# Altium PCB PMS.PcbDoc (part 1 of 2)
Units mil, origin at the board's own origin, x right, y up, seen from the top; angles counter-clockwise.
Board outline 4750 x 3250 mil, 4 copper layers (Top Layer, Layer 1, Layer 2, Bottom Layer), stack 23.756 mil thick; 171 components, 112 nets, 581 pads, 159 vias.
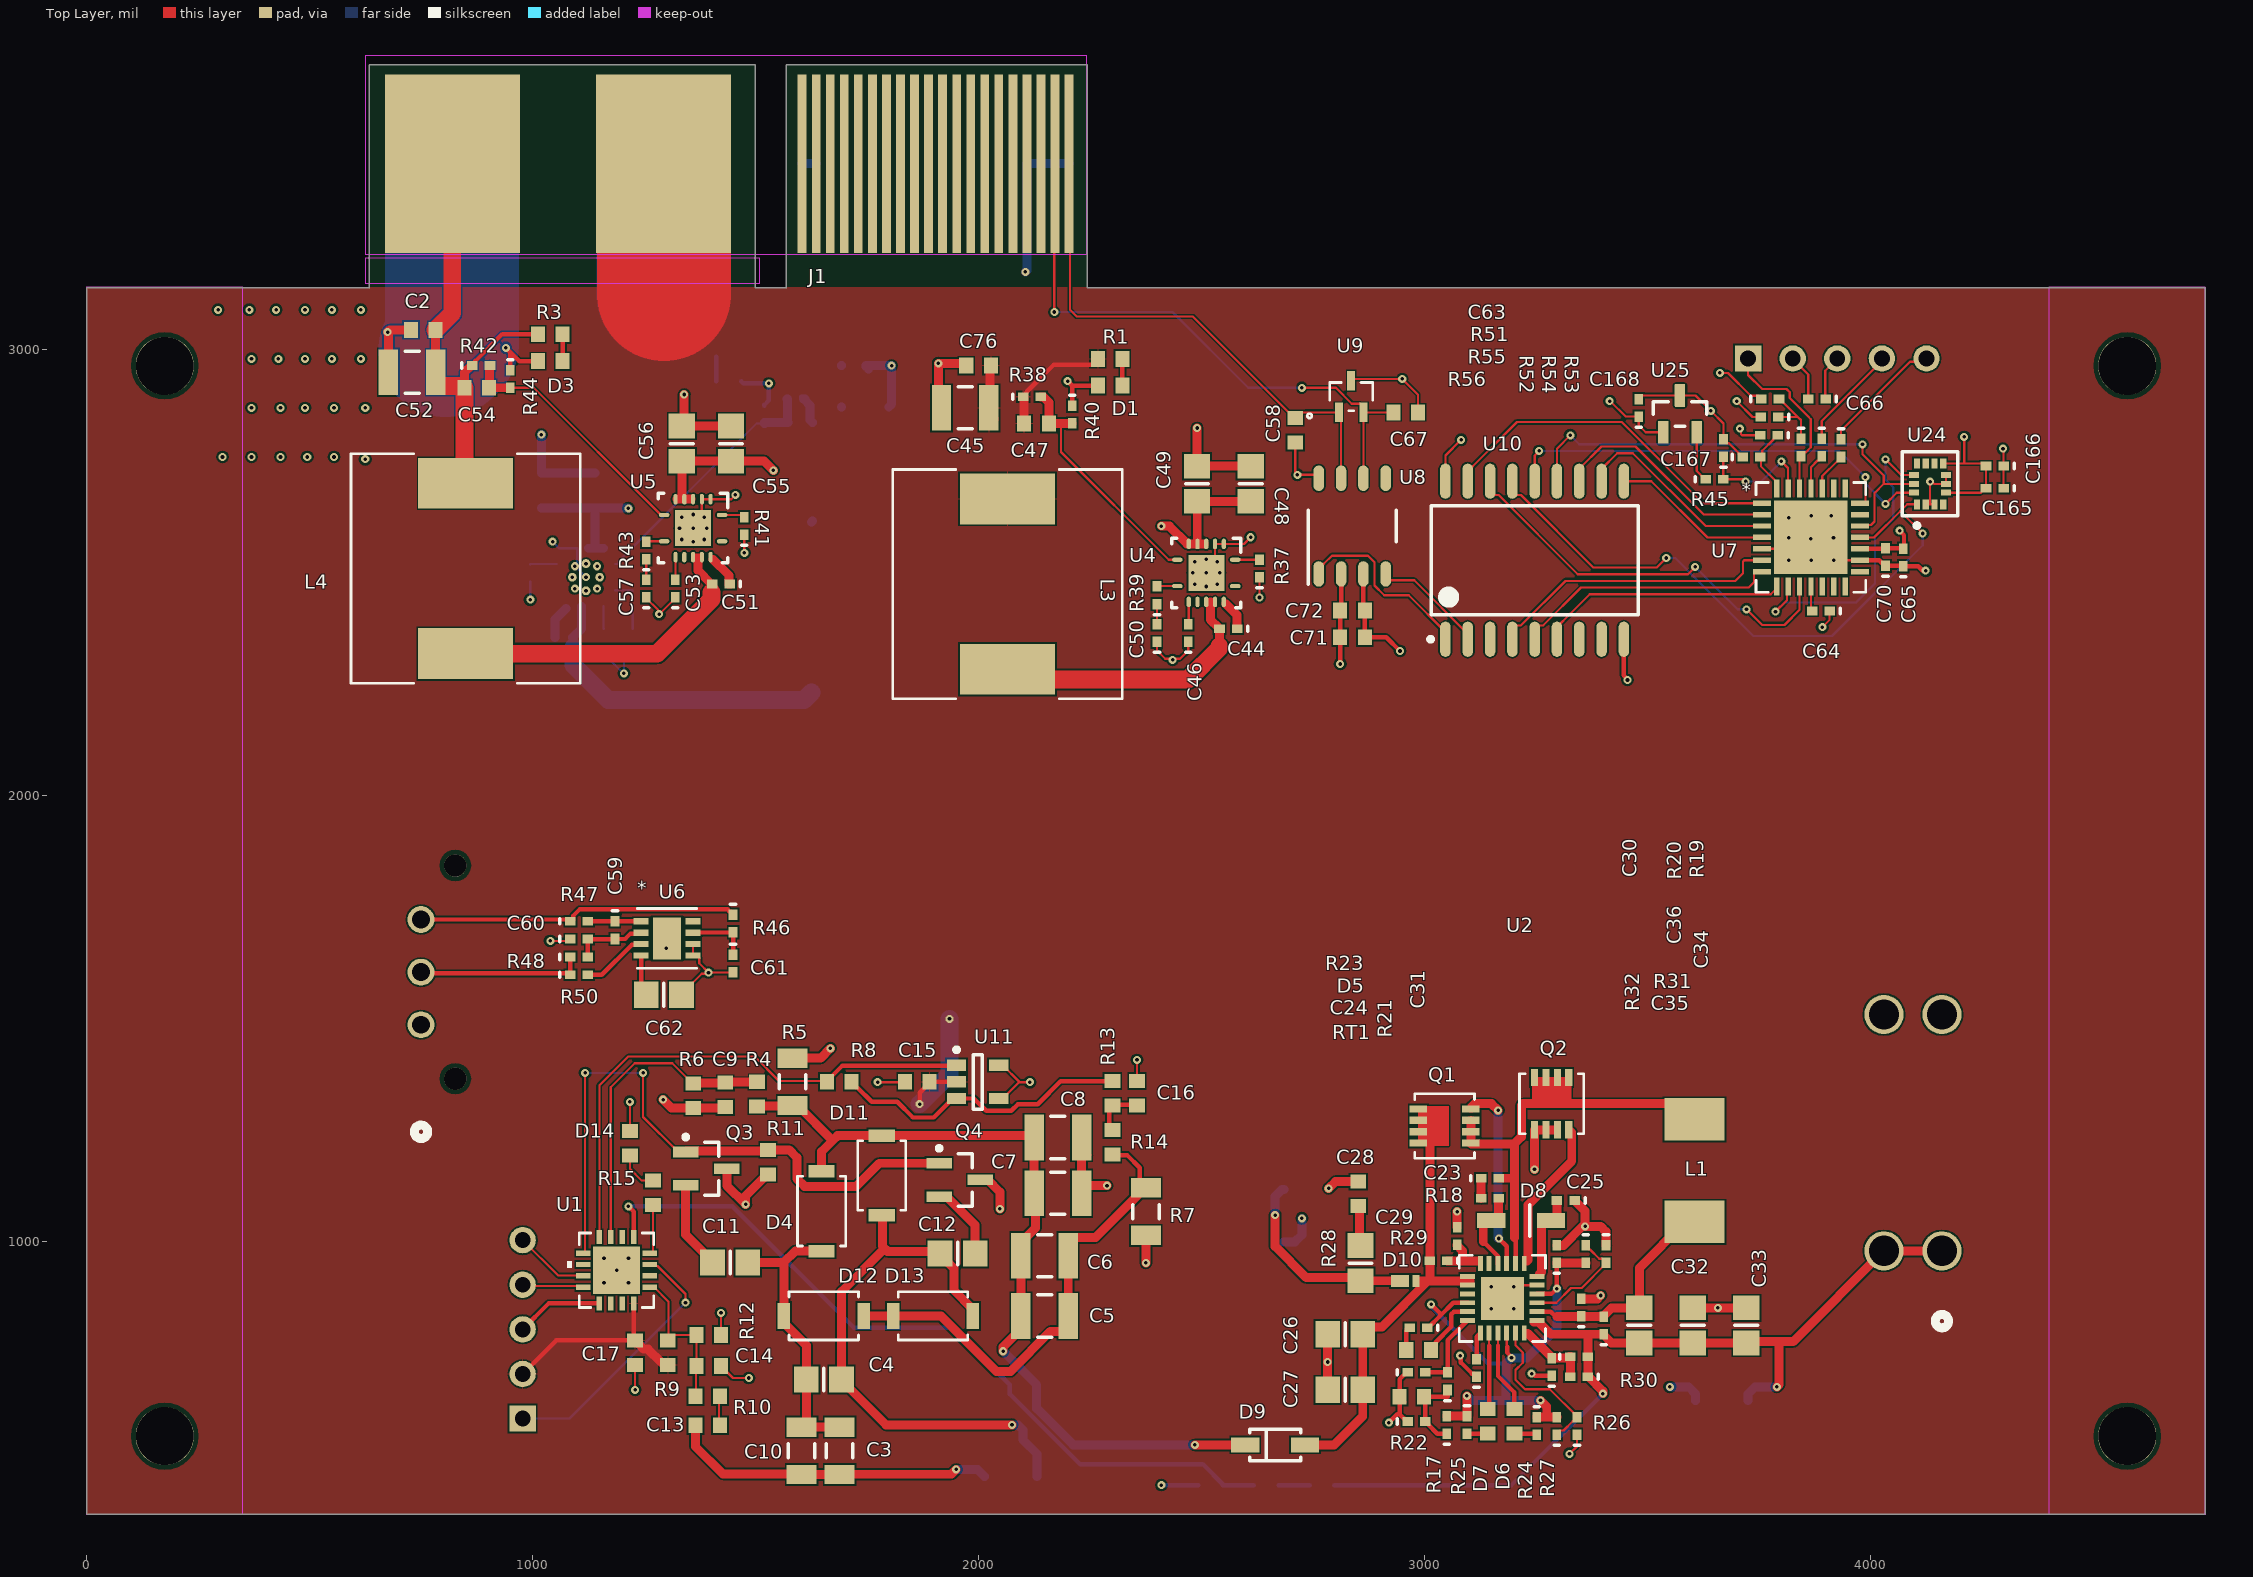
[diagram p0: Top Layer view]
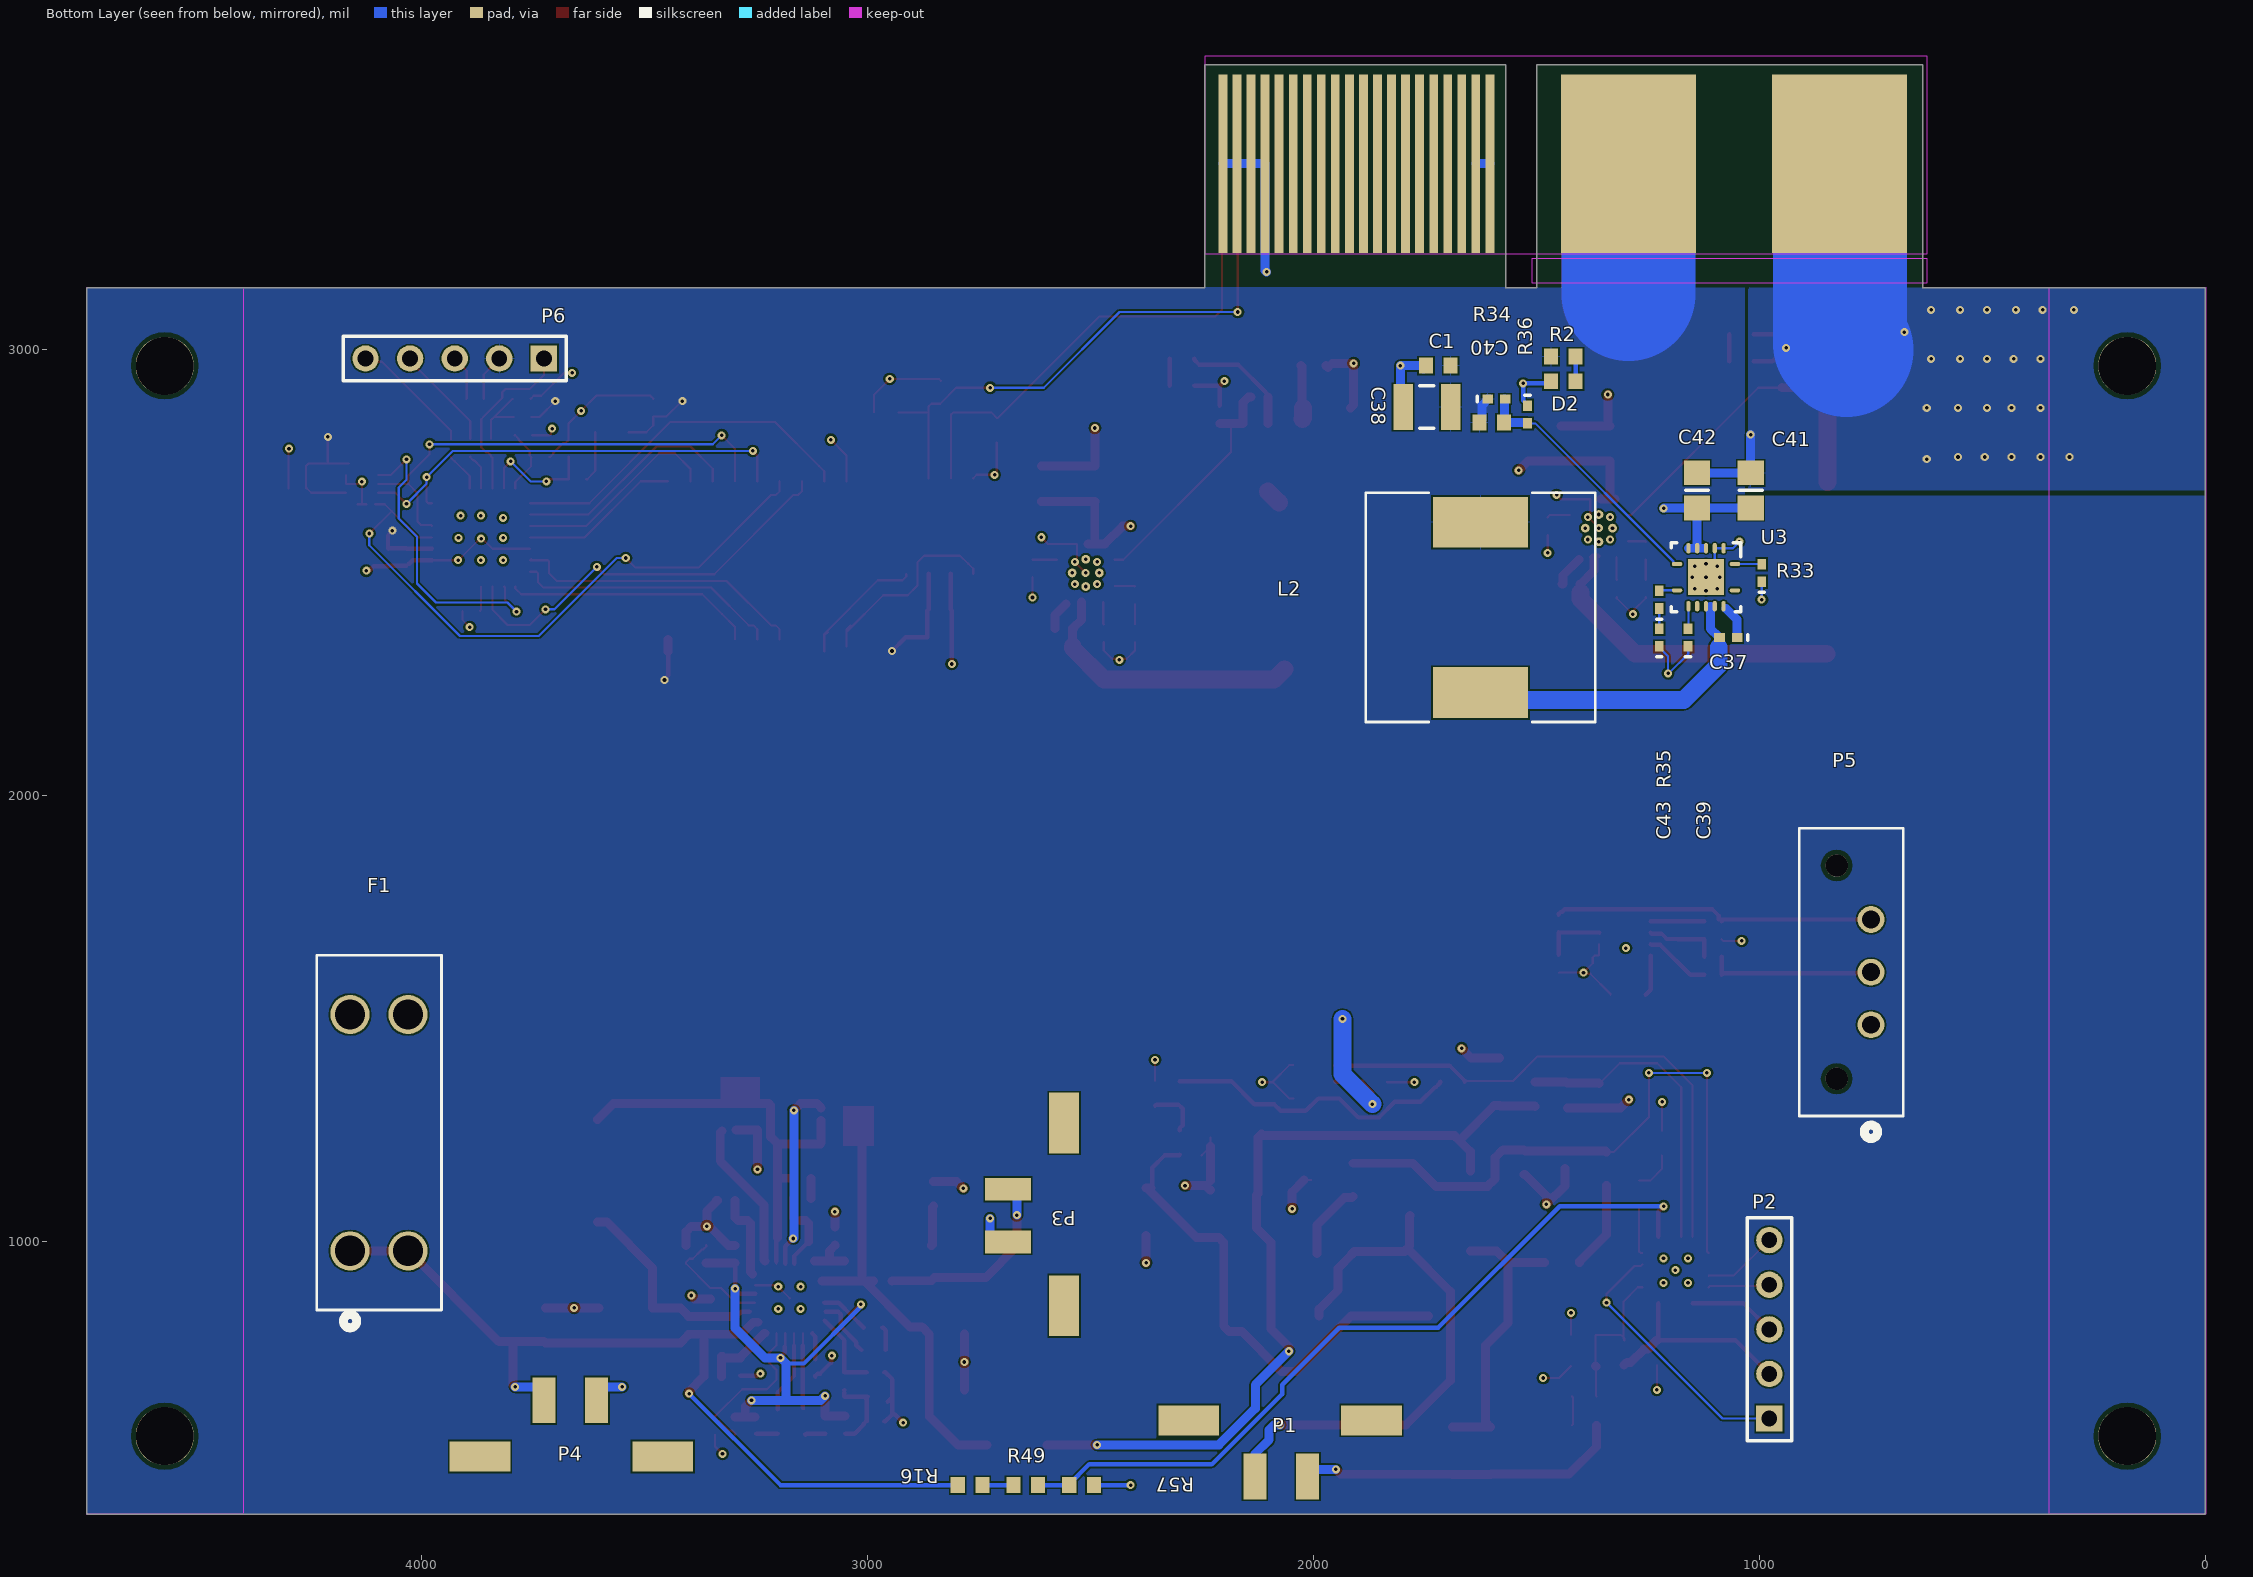
[diagram p1: Bottom Layer view, seen from below]
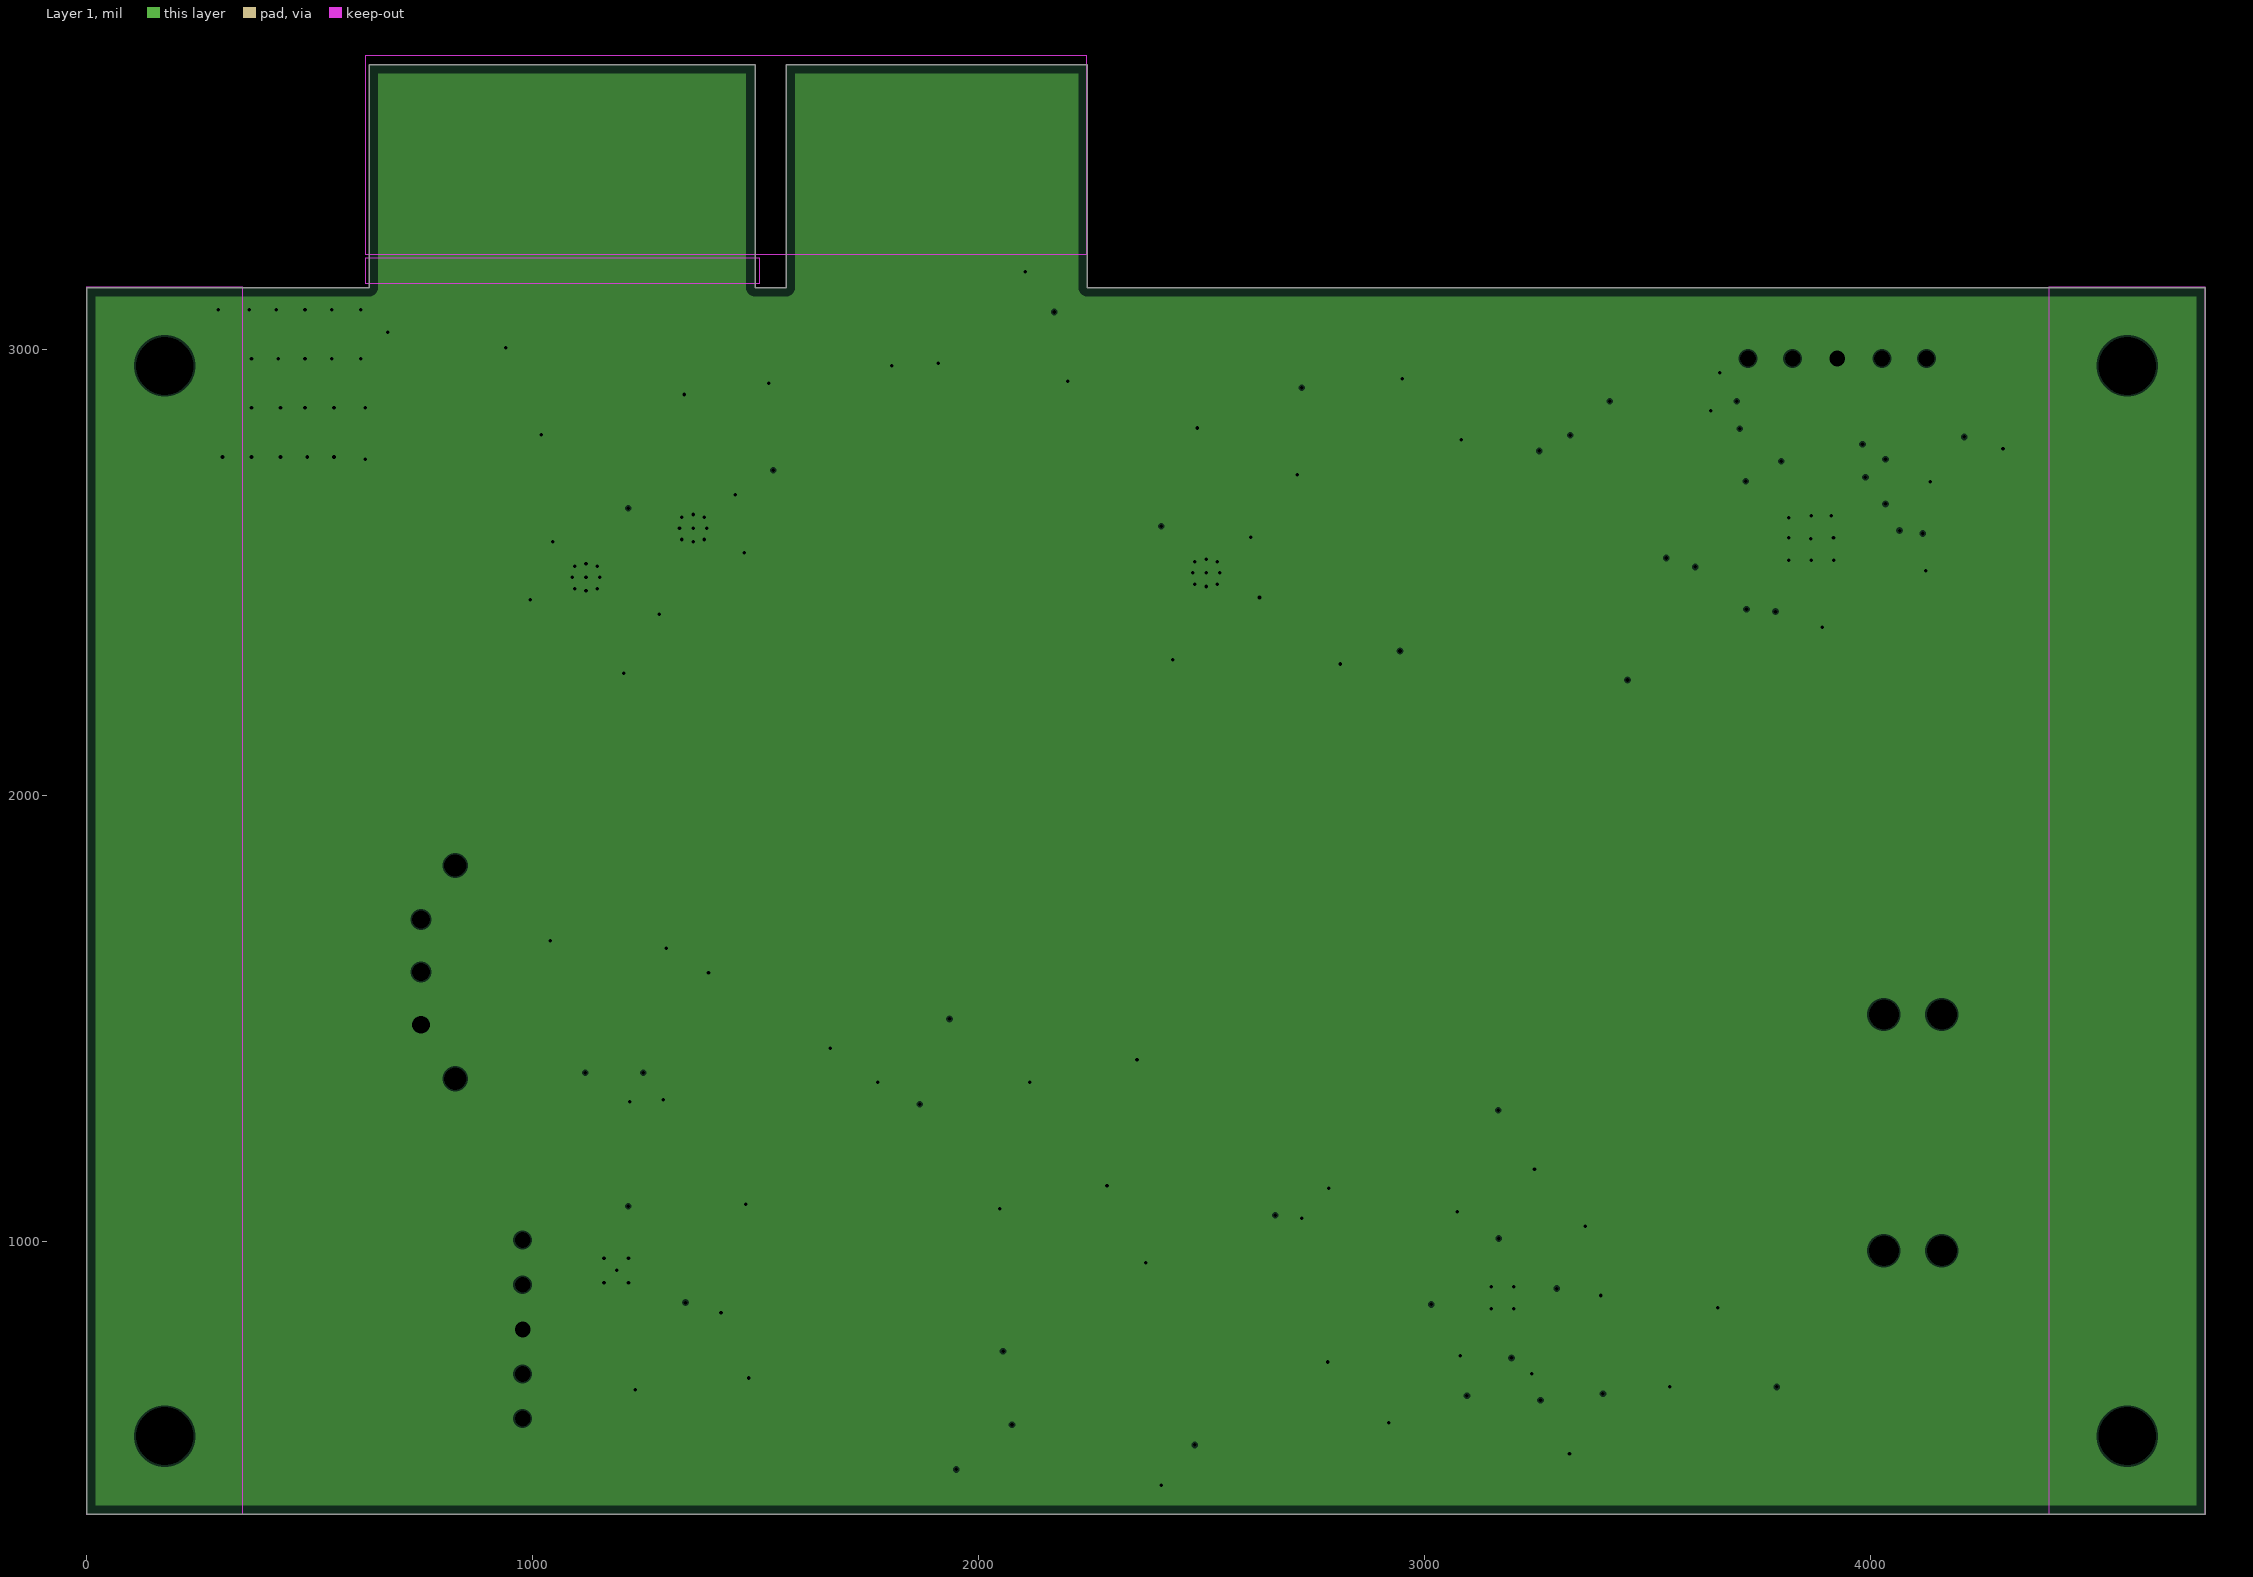
[diagram p2: Layer 1, clearances drawn from the general rule]
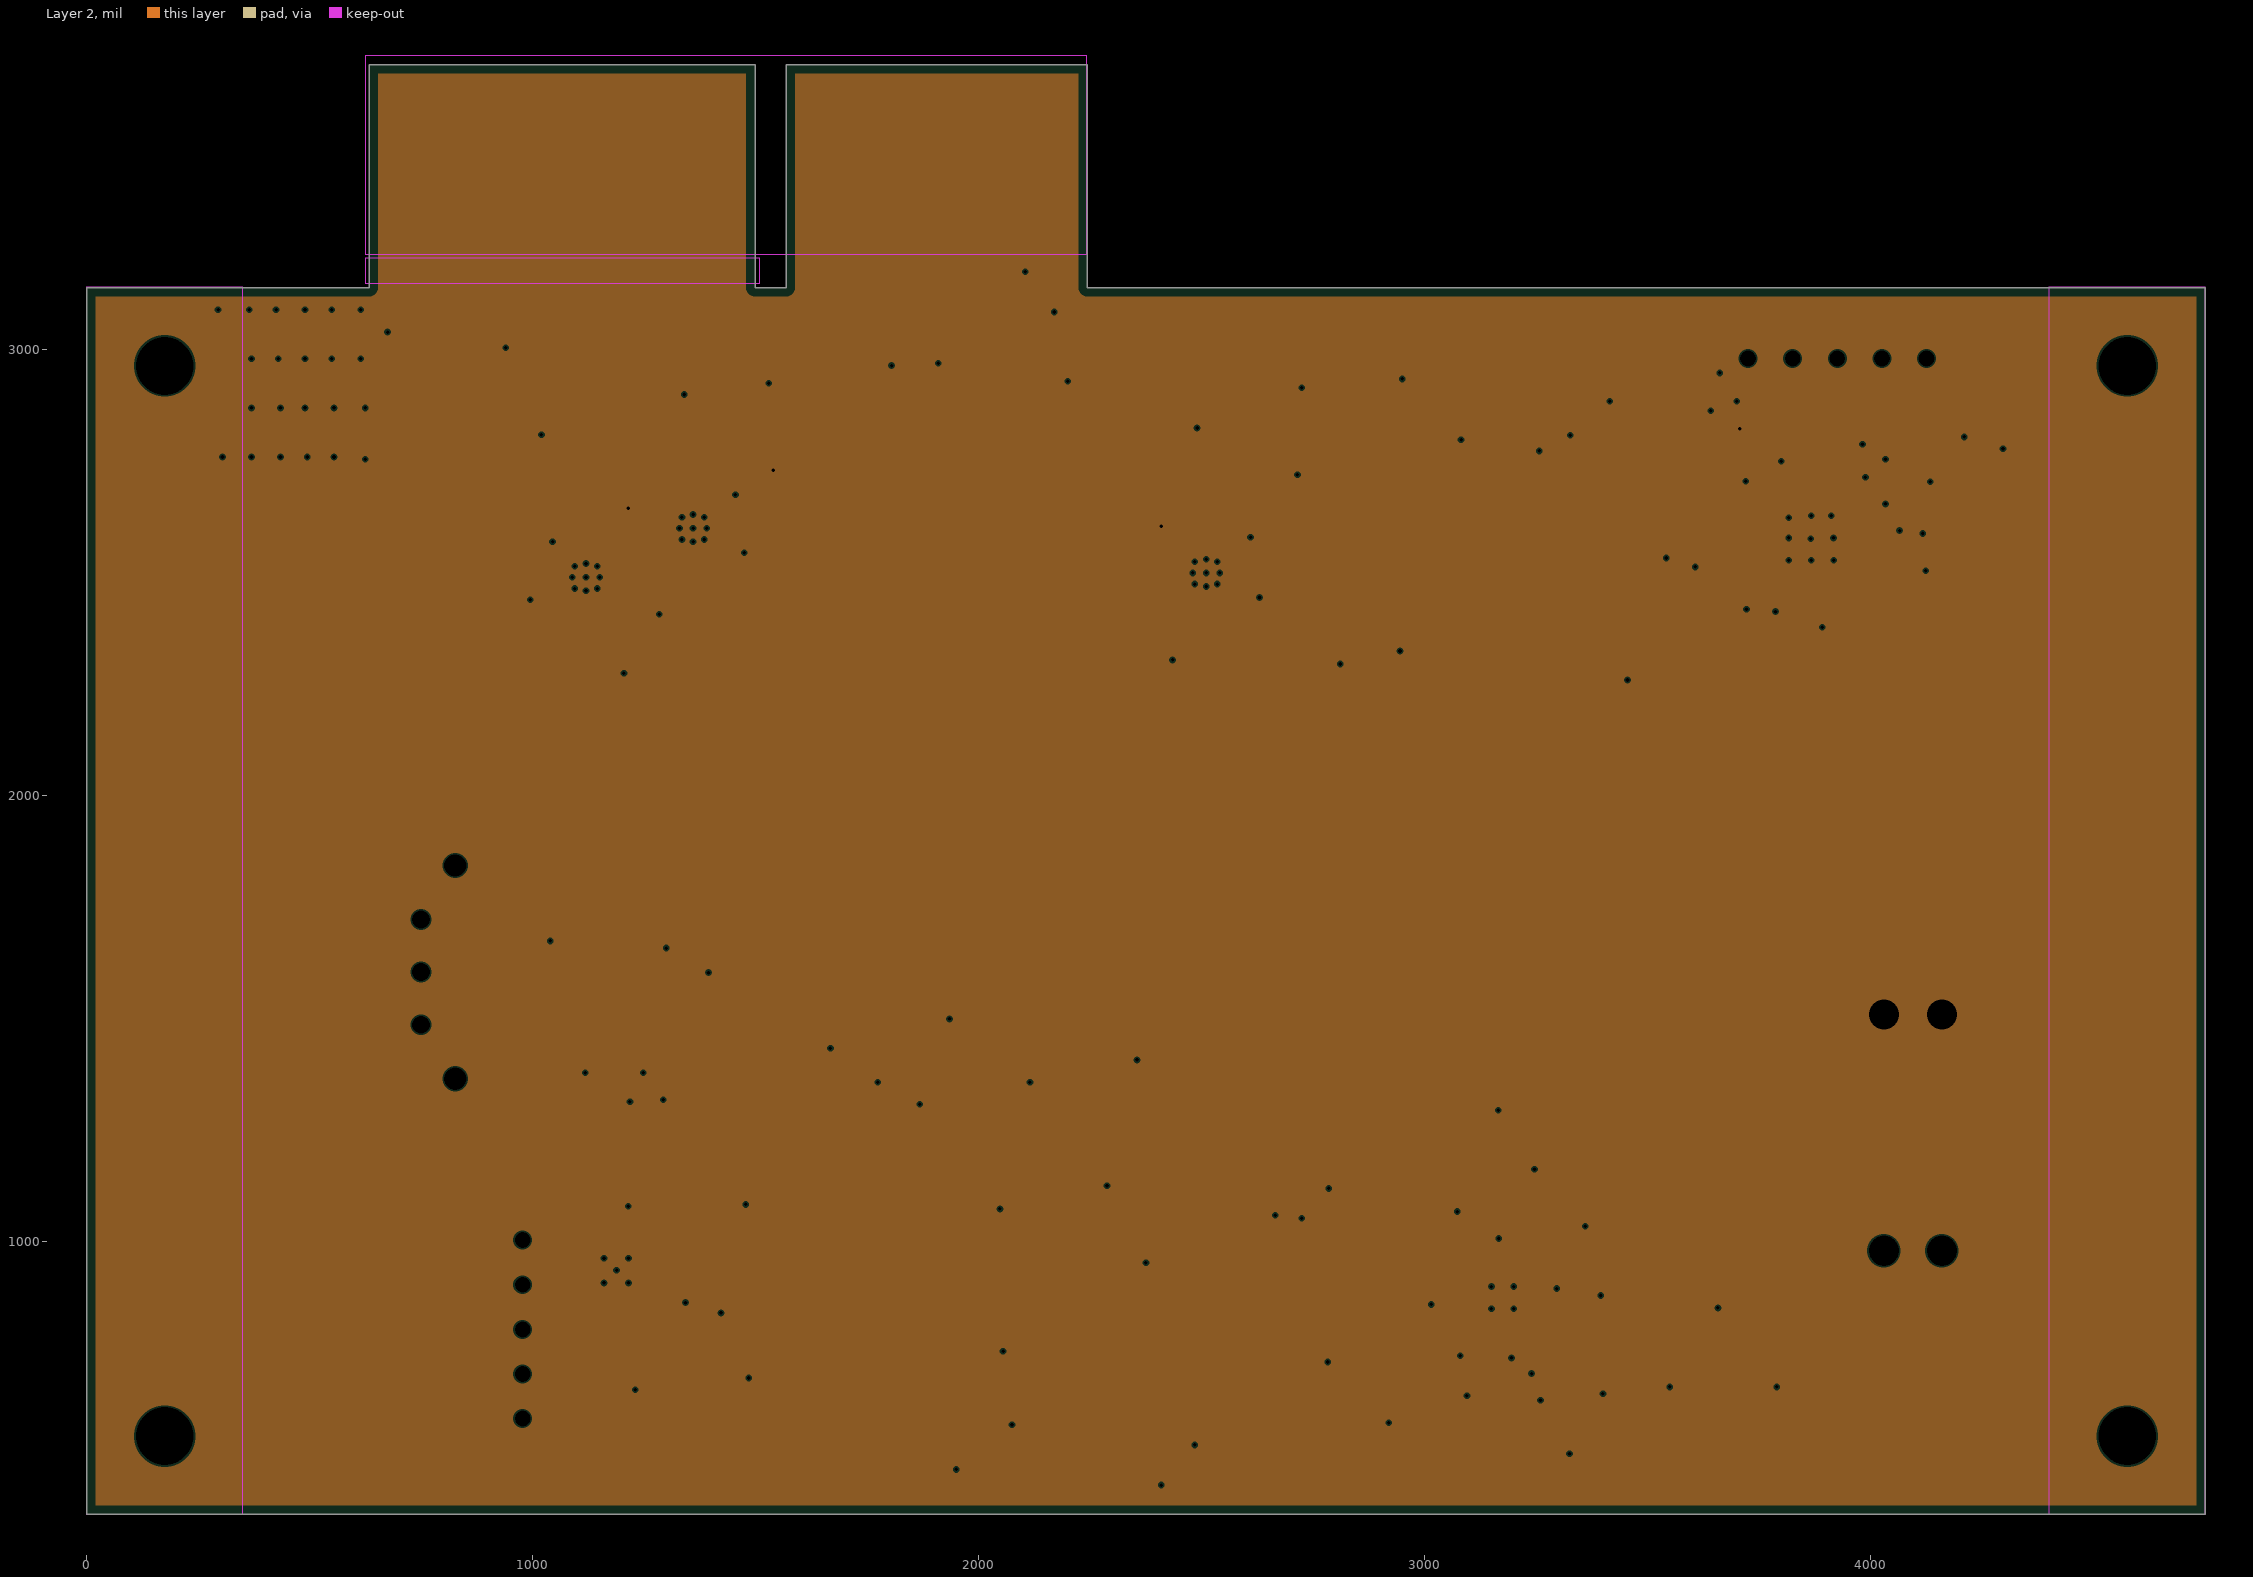
[diagram p3: Layer 2, clearances drawn from the general rule]

## Layer stack, top to bottom
Top Solder: solder mask 0.4, Solder Resist, Dk 3.5
Top Layer: signal copper 1.4
Dielectric 2: prepreg 2.8, PP-006, Dk 4.1
Layer 1: plane copper 1.378, net GND
Dielectric 1: dielectric 12.6, FR-4, Dk 4.8
Layer 2: plane copper 1.378, net NetC41_2
Dielectric 3: prepreg 2.8, PP-006, Dk 4.1
Bottom Layer: signal copper 1.4
Bottom Solder: solder mask 0.4, Solder Resist, Dk 3.5

## Board outline
0.5,389.5 0.5,3139.5 633.87,3139.5 633.87,3639.5 1498.87,3639.5 1498.87,3139.5 1568.87,3139.5 1568.87,3639.5 2243.86,3639.5 2243.86,3139.5 4750.5,3139.5 4750.5,389.5

## Design rules (kind name [scope] priority, off if disabled: settings)
BoardOutlineClearance [All] p1: gap=7.87 ignorepadtopadclearanceinfootprint=FALSE
Clearance [All] p1: gap=3.54 ignorepadtopadclearanceinfootprint=FALSE except(5: Arc-Via Track-Via SMDPad-Via THPad-Via Via-Via Via-Fill Via-Poly Via-Region Via-Text; 9.84: Arc-Hole Track-Hole SMDPad-Hole THPad-Hole Via-Hole Fill-Hole Poly-Hole Region-Hole Text-Hole)
ComponentClearance [All] p1: gap=3.5 collisioncheckmode=3 verticalgap=3.5 showdistances=TRUE
DiffPairsRouting 120OhmDiffPairs [InDifferentialPairClass('120Ohm')] p1: maxlimit=5 minlimit=5 mostfreqgap=5 substack1={5B3CBE88-527F-45CC-934D-B3D730501180} toplayer_{5b3cbe88-527f-45cc-934d-b3d730501180}_minwidth=15 toplayer_{5b3cbe88-527f-45cc-934d-b3d730501180}_maxwidth=15 toplayer_{5b3cbe88-527f-45cc-934d-b3d730501180}_prefwidth=15 bottomlayer_{5b3cbe88-527f-45cc-934d-b3d730501180}_minwidth=15 bottomlayer_{5b3cbe88-527f-45cc-934d-b3d730501180}_maxwidth=15 bottomlayer_{5b3cbe88-527f-45cc-934d-b3d730501180}_prefwidth=15 toplayer_minwidth=2.63 toplayer_maxwidth=2.63 toplayer_prefwidth=2.63 bottomlayer_minwidth=2.63 bottomlayer_maxwidth=2.63 bottomlayer_prefwidth=2.63 substack2={670BDCB0-0926-4304-8001-FDB9BD357462} toplayer_{670bdcb0-0926-4304-8001-fdb9bd357462}_minwidth=15 toplayer_{670bdcb0-0926-4304-8001-fdb9bd357462}_maxwidth=15 toplayer_{670bdcb0-0926-4304-8001-fdb9bd357462}_prefwidth=15 bottomlayer_{670bdcb0-0926-4304-8001-fdb9bd357462}_minwidth=15 bottomlayer_{670bdcb0-0926-4304-8001-fdb9bd357462}_maxwidth=15 bottomlayer_{670bdcb0-0926-4304-8001-fdb9bd357462}_prefwidth=15 substack3={A201DB0F-6F31-4885-A301-8523EAE111D3} toplayer_{a201db0f-6f31-4885-a301-8523eae111d3}_minwidth=15 toplayer_{a201db0f-6f31-4885-a301-8523eae111d3}_maxwidth=15 toplayer_{a201db0f-6f31-4885-a301-8523eae111d3}_prefwidth=15 bottomlayer_{a201db0f-6f31-4885-a301-8523eae111d3}_minwidth=15 bottomlayer_{a201db0f-6f31-4885-a301-8523eae111d3}_maxwidth=15 bottomlayer_{a201db0f-6f31-4885-a301-8523eae111d3}_prefwidth=15 impedanceprofiledriven=TRUE impedanceprofileid={E287B070-1990-45AA-885F-49F5262516A6} maxuncoupledlength=500
DiffPairsRouting 100OhmDiffPairs [InDifferentialPairClass('100Ohm')] p2: maxlimit=5 minlimit=5 mostfreqgap=5 substack1={5B3CBE88-527F-45CC-934D-B3D730501180} toplayer_{5b3cbe88-527f-45cc-934d-b3d730501180}_minwidth=15 toplayer_{5b3cbe88-527f-45cc-934d-b3d730501180}_maxwidth=15 toplayer_{5b3cbe88-527f-45cc-934d-b3d730501180}_prefwidth=15 bottomlayer_{5b3cbe88-527f-45cc-934d-b3d730501180}_minwidth=15 bottomlayer_{5b3cbe88-527f-45cc-934d-b3d730501180}_maxwidth=15 bottomlayer_{5b3cbe88-527f-45cc-934d-b3d730501180}_prefwidth=15 toplayer_minwidth=4.51 toplayer_maxwidth=4.51 toplayer_prefwidth=4.51 bottomlayer_minwidth=4.51 bottomlayer_maxwidth=4.51 bottomlayer_prefwidth=4.51 substack2={670BDCB0-0926-4304-8001-FDB9BD357462} toplayer_{670bdcb0-0926-4304-8001-fdb9bd357462}_minwidth=15 toplayer_{670bdcb0-0926-4304-8001-fdb9bd357462}_maxwidth=15 toplayer_{670bdcb0-0926-4304-8001-fdb9bd357462}_prefwidth=15 bottomlayer_{670bdcb0-0926-4304-8001-fdb9bd357462}_minwidth=15 bottomlayer_{670bdcb0-0926-4304-8001-fdb9bd357462}_maxwidth=15 bottomlayer_{670bdcb0-0926-4304-8001-fdb9bd357462}_prefwidth=15 substack3={A201DB0F-6F31-4885-A301-8523EAE111D3} toplayer_{a201db0f-6f31-4885-a301-8523eae111d3}_minwidth=15 toplayer_{a201db0f-6f31-4885-a301-8523eae111d3}_maxwidth=15 toplayer_{a201db0f-6f31-4885-a301-8523eae111d3}_prefwidth=15 bottomlayer_{a201db0f-6f31-4885-a301-8523eae111d3}_minwidth=15 bottomlayer_{a201db0f-6f31-4885-a301-8523eae111d3}_maxwidth=15 bottomlayer_{a201db0f-6f31-4885-a301-8523eae111d3}_prefwidth=15 impedanceprofiledriven=TRUE impedanceprofileid={2AE41D91-29D4-4592-BCE6-4F755B01D198} maxuncoupledlength=500
DiffPairsRouting 90OhmDiffPairs [InDifferentialPairClass('90Ohm')] p3: maxlimit=5 minlimit=5 mostfreqgap=5 substack1={5B3CBE88-527F-45CC-934D-B3D730501180} toplayer_{5b3cbe88-527f-45cc-934d-b3d730501180}_minwidth=15 toplayer_{5b3cbe88-527f-45cc-934d-b3d730501180}_maxwidth=15 toplayer_{5b3cbe88-527f-45cc-934d-b3d730501180}_prefwidth=15 bottomlayer_{5b3cbe88-527f-45cc-934d-b3d730501180}_minwidth=15 bottomlayer_{5b3cbe88-527f-45cc-934d-b3d730501180}_maxwidth=15 bottomlayer_{5b3cbe88-527f-45cc-934d-b3d730501180}_prefwidth=15 toplayer_minwidth=5.85 toplayer_maxwidth=5.85 toplayer_prefwidth=5.85 bottomlayer_minwidth=5.85 bottomlayer_maxwidth=5.85 bottomlayer_prefwidth=5.85 substack2={670BDCB0-0926-4304-8001-FDB9BD357462} toplayer_{670bdcb0-0926-4304-8001-fdb9bd357462}_minwidth=15 toplayer_{670bdcb0-0926-4304-8001-fdb9bd357462}_maxwidth=15 toplayer_{670bdcb0-0926-4304-8001-fdb9bd357462}_prefwidth=15 bottomlayer_{670bdcb0-0926-4304-8001-fdb9bd357462}_minwidth=15 bottomlayer_{670bdcb0-0926-4304-8001-fdb9bd357462}_maxwidth=15 bottomlayer_{670bdcb0-0926-4304-8001-fdb9bd357462}_prefwidth=15 substack3={A201DB0F-6F31-4885-A301-8523EAE111D3} toplayer_{a201db0f-6f31-4885-a301-8523eae111d3}_minwidth=15 toplayer_{a201db0f-6f31-4885-a301-8523eae111d3}_maxwidth=15 toplayer_{a201db0f-6f31-4885-a301-8523eae111d3}_prefwidth=15 bottomlayer_{a201db0f-6f31-4885-a301-8523eae111d3}_minwidth=15 bottomlayer_{a201db0f-6f31-4885-a301-8523eae111d3}_maxwidth=15 bottomlayer_{a201db0f-6f31-4885-a301-8523eae111d3}_prefwidth=15 impedanceprofiledriven=TRUE impedanceprofileid={0AC2A555-4B6F-4755-A2BA-0C0075E72B6B} maxuncoupledlength=500
DiffPairsRouting [All] p4: maxlimit=3.54 minlimit=3.54 mostfreqgap=3.54 substack1={5B3CBE88-527F-45CC-934D-B3D730501180} toplayer_{5b3cbe88-527f-45cc-934d-b3d730501180}_minwidth=15 toplayer_{5b3cbe88-527f-45cc-934d-b3d730501180}_maxwidth=15 toplayer_{5b3cbe88-527f-45cc-934d-b3d730501180}_prefwidth=15 bottomlayer_{5b3cbe88-527f-45cc-934d-b3d730501180}_minwidth=15 bottomlayer_{5b3cbe88-527f-45cc-934d-b3d730501180}_maxwidth=15 bottomlayer_{5b3cbe88-527f-45cc-934d-b3d730501180}_prefwidth=15 toplayer_minwidth=3.54 toplayer_maxwidth=71497.94 toplayer_prefwidth=3.54 bottomlayer_minwidth=3.54 bottomlayer_maxwidth=71497.94 bottomlayer_prefwidth=3.54 substack2={670BDCB0-0926-4304-8001-FDB9BD357462} toplayer_{670bdcb0-0926-4304-8001-fdb9bd357462}_minwidth=15 toplayer_{670bdcb0-0926-4304-8001-fdb9bd357462}_maxwidth=15 toplayer_{670bdcb0-0926-4304-8001-fdb9bd357462}_prefwidth=15 bottomlayer_{670bdcb0-0926-4304-8001-fdb9bd357462}_minwidth=15 bottomlayer_{670bdcb0-0926-4304-8001-fdb9bd357462}_maxwidth=15 bottomlayer_{670bdcb0-0926-4304-8001-fdb9bd357462}_prefwidth=15 substack3={A201DB0F-6F31-4885-A301-8523EAE111D3} toplayer_{a201db0f-6f31-4885-a301-8523eae111d3}_minwidth=15 toplayer_{a201db0f-6f31-4885-a301-8523eae111d3}_maxwidth=15 toplayer_{a201db0f-6f31-4885-a301-8523eae111d3}_prefwidth=15 bottomlayer_{a201db0f-6f31-4885-a301-8523eae111d3}_minwidth=15 bottomlayer_{a201db0f-6f31-4885-a301-8523eae111d3}_maxwidth=15 bottomlayer_{a201db0f-6f31-4885-a301-8523eae111d3}_prefwidth=15 maxuncoupledlength=500
Height [All] p1: minheight=0 maxheight=71497.94 prefheight=500
HoleSize [All] p1: absolutevalues=TRUE maxlimit=248.03 minlimit=7.87 maxpercent=80.000 minpercent=20.000
HoleToHoleClearance [All] p1: gap=9.84 allowstackedmicrovias=FALSE
MinimumAnnularRing [All] p1: minimumring=3
MinimumSolderMaskSliver [All] p1: minsoldermaskwidth=0
PlaneClearance [All] p1: clearance=3.5
PlaneConnect PlaneConnectPowerPads [InPadClass('PowerPads')] p1: planeconnectstyle=Direct reliefexpansion=20 reliefentries=4 reliefconductorwidth=10 reliefairgap=10
PlaneConnect [All] p2: pad.planeconnectstyle=Relief pad.reliefexpansion=11.81 pad.reliefentries=4 pad.reliefconductorwidth=3.5 pad.reliefairgap=3.5 via.planeconnectstyle=Direct via.reliefexpansion=11.81 via.reliefentries=4 via.reliefconductorwidth=5 via.reliefairgap=5
PolygonConnect PolygonConnectPowerPads [All vs (InPadClass('PowerPads'))] p1: connectstyle=Direct reliefconductorwidth=10 reliefentries=4 polygonreliefangle="90 Angle" airgapwidth=10
PolygonConnect [All] p2: thpad.connectstyle=Relief thpad.reliefconductorwidth=3.5 thpad.reliefentries=4 thpad.polygonreliefangle="90 Angle" thpad.airgapwidth=3.5 smdpad.connectstyle=Relief smdpad.reliefconductorwidth=3.5 smdpad.reliefentries=4 smdpad.polygonreliefangle="90 Angle" smdpad.airgapwidth=3.5 via.connectstyle=Direct via.reliefconductorwidth=5 via.reliefentries=4 via.polygonreliefangle="90 Angle" via.airgapwidth=5
ReturnPath 120OhmReturn [InDifferentialPairClass('120Ohm')] p1: impedanceprofileid={E287B070-1990-45AA-885F-49F5262516A6} _gaplimit=0 _useantipads=TRUE
ReturnPath 100OhmReturn [InDifferentialPairClass('100Ohm')] p2: impedanceprofileid={2AE41D91-29D4-4592-BCE6-4F755B01D198} _gaplimit=0 _useantipads=TRUE
ReturnPath 90OhmReturn [InDifferentialPairClass('90Ohm')] p3: impedanceprofileid={0AC2A555-4B6F-4755-A2BA-0C0075E72B6B} _gaplimit=0 _useantipads=TRUE
ReturnPath 60OhmReturn [InNetClass('60Ohm')] p4: impedanceprofileid={AA7C0548-6338-4AC9-AD2A-66174299CF1B} _gaplimit=0 _useantipads=TRUE
ReturnPath 50OhmReturn [InNetClass('50Ohm')] p5: impedanceprofileid={38A28C89-5808-4632-B31D-CFF1778F07F1} _gaplimit=0 _useantipads=TRUE
RoomDefinition Power+CAN [InComponentClass('Power+CAN')] p1: confinementstyle=ConfineIn formatcopy=TRUE lockcomponents=FALSE outline 4770,1325 4770,1655 4250,1655 4250,1325
RoutingVias [All] p1: holewidth=7.87 width=17.72 viastyle="Through Hole" minholewidth=7.87 minwidth=17.72 maxholewidth=248.03 maxwidth=257.87
SilkToSilkClearance [All] p1: silktosilkclearance=0
SilkToSolderMaskClearance [IsPad] p1: minsilkscreentomaskgap=3.5 clearancetoexposedcopper=TRUE
SolderMaskExpansion ViaSolderMaskExpansion [IsVia] p1: expansion=4 istentingtop=TRUE
SolderMaskExpansion [All] p2: expansion=2.95 istentingtop=FALSE
Width 60OhmWidth [InNetClass('60Ohm')] p1: maxlimit=4.59 minlimit=4.59 preferedwidth=4.59 substack1={5B3CBE88-527F-45CC-934D-B3D730501180} substack2={670BDCB0-0926-4304-8001-FDB9BD357462} substack3={A201DB0F-6F31-4885-A301-8523EAE111D3} impedanceprofiledriven=TRUE impedanceprofileid={AA7C0548-6338-4AC9-AD2A-66174299CF1B} minimp=50.000000 maximp=50.000000 favimp=50.000000
Width 50OhmWidth [InNetClass('50Ohm')] p2: maxlimit=6.79 minlimit=6.79 preferedwidth=6.79 substack1={5B3CBE88-527F-45CC-934D-B3D730501180} substack2={670BDCB0-0926-4304-8001-FDB9BD357462} substack3={A201DB0F-6F31-4885-A301-8523EAE111D3} impedanceprofiledriven=TRUE impedanceprofileid={38A28C89-5808-4632-B31D-CFF1778F07F1} minimp=50.000000 maximp=50.000000 favimp=50.000000
Width [All] p3: maxlimit=71497.94 minlimit=3.54 preferedwidth=3.54 substack1={5B3CBE88-527F-45CC-934D-B3D730501180} substack2={670BDCB0-0926-4304-8001-FDB9BD357462} substack3={A201DB0F-6F31-4885-A301-8523EAE111D3} minimp=50.000000 maximp=50.000000 favimp=50.000000
20 further rules are at their usual default settings.

## Classes and differential pairs
component class Designator: C23 C24 C25 C26 C27 C28 C29 C30 C31 C32 C33 C34 C35 C36 D5 D6 D7 D8 D9 D10 F1 L1 P3 P4 Q1 Q2 R17 R18 R19 R20 R21 R22 R23 R24 R25 R26 R27 R28 R29 R30 R31 R32 RT1 U2

## Components (designator, comment, footprint, x,y, rotation, side; value= is the part's Value field where it differs from the comment)
C1 "Cap" 1608[0603] 1720,2965 r180 bottom value=NP
C2 "Cap" 1608[0603] 755,3045 r0 top value=NP
C3 "Cap" C1206 1688.42,531.7 r90 top value=100nF
C4 "Cap" 6-0805_M 1653.42,691.7 r0 top value=3.3nF
C5 "Cap" C1210 2148,834.1 r180 top value=10uF
C6 "Cap" C1210 2148,969.1 r180 top value=10uF
C7 "Cap" C1210 2178,1109.1 r180 top value=10uF
C8 "Cap" C1210 2178,1234.1 r180 top value=10uF
C9 "Cap" 1608[0603] 1432.21,1329.7 r90 top value=1nF
C10 "Cap" C1206 1603.42,531.7 r90 top value=100nF
C11 "Cap" 6-0805_M 1443,954.1 r0 top value=47nF
C12 "Cap" 6-0805_M 1953,974.1 r180 top value=47nF
C13 "Cap" 1608[0603] 1393,589.1 r0 top value=68pF
C14 "Cap" 1608[0603] 1395.07,721.7 r180 top value=68pF
C15 "Cap" 1608[0603] 1863,1359.1 r0 top value=100nF
C16 "Cap" 1608[0603] 2355.31,1333.2 r270 top value=100nF
C17 "Cap" 1608[0603] 1230.07,751.7 r90 top value=100nF
C23 "Cap" 0402-A 3146.58,1142.79 r0 top value=100nF
C24 "Cap" 0402-A 2981.58,707.79 r0 top value=100nF
C25 "Cap" 0402-A 3316.58,1092.79 r180 top value=1uF
C26 "Cap" 6-0805_M 2822.03,793.44 r0 top value=10uF
C27 "Cap" 6-0805_M 2822.03,668.44 r0 top value=10uF
C28 "Cap" 1608[0603] 2851.58,1107.79 r270 top value=2.2uF
C29 "Cap" 0402-A 3073.19,1013.46 r90 top value=1uF
C30 "Cap" 0402-A 3296.58,972.79 r90 top value=1uF
C31 "Cap" 0402-A 3116.58,717.79 r90 top value=47nF
C32 "Cap" 6-0805_M 3601.58,812.79 r270 top value=10uF
C33 "Cap" 6-0805_M 3721.58,812.79 r270 top value=10uF
C34 "Cap" 0402-A 3401.58,812.79 r90 top value=100nF
C35 "Cap" 0402-A 3346.58,697.79 r180 top value=22pF
C36 "Cap" 0402-A 3351.58,852.79 r90 top value=100nF
C37 "Cap" 0402-A 1070,2355 r0 bottom value=470nF
C38 "Cap" C1210 1745.64,2872.01 r180 bottom value=100uF
C39 "Cap" 0402-A 1160,2355 r90 bottom value=3.9nF
C40 "Cap" 1608[0603] 1600.64,2837.01 r0 bottom value=NP
C41 "Cap" 6-0805_M 1020,2685 r270 bottom value=10uF
C42 "Cap" 6-0805_M 1140,2685 r270 bottom value=4.7uF
C43 "Cap" 0402-A 1225,2355 r90 bottom value=22nF
C44 "Cap" 0402-A 2560,2375 r180 top value=470nF
C45 "Cap" C1210 1970,2870 r0 top value=100uF
C46 "Cap" 0402-A 2470,2365 r90 top value=3.9nF
C47 "Cap" 1608[0603] 2130,2835 r180 top value=NP
C48 "Cap" 6-0805_M 2610,2700 r270 top value=10uF
C49 "Cap" 6-0805_M 2490,2700 r270 top value=4.7uF
C50 "Cap" 0402-A 2400,2365 r90 top value=15nF
C51 "Cap" 0402-A 1422.72,2475 r180 top value=470nF
C52 "Cap" C1210 730,2950 r0 top value=100uF
C53 "Cap" 0402-A 1320,2465 r90 top value=3.9nF
C54 "Cap" 1608[0603] 875,2915 r180 top value=NP
C55 "Cap" 6-0805_M 1445,2790 r270 top value=10uF
C56 "Cap" 6-0805_M 1335,2790 r270 top value=4.7uF
C57 "Cap" 0402-A 1255,2465 r90 top value=33nF
C58 "Cap" 1608[0603] 2710,2820 r90 top value=100nF
C59 "Cap" 0402-A 1184.66,1699 r270 top value=100nF
C60 "Cap" 0402-A 1104.66,1679 r0 top value=100nF
C61 "Cap" 0402-A 1449.66,1624 r270 top value=100nF
C62 "Cap" 6-0805_M 1294.66,1554 r180 top value=330nF
C63 "Cap" 0402-A 3775,2890 r0 top value=100nF
C64 "Cap" 0402-A 3888.51,2414.67 r180 top value=100nF
C65 "Cap" 0402-A 4073.51,2534.67 r90 top value=100nF
C66 "Cap" 0402-A 3880,2890 r180 top value=100nF
C67 "Cap" 1608[0603] 2957.94,2860 r180 top value=100nF
C70 "Cap" 0402-A 4033.79,2535.56 r90 top value=100nF
C71 "Cap" 1608[0603] 2838.45,2355.78 r180 top value=100nF
C72 "Cap" 1608[0603] 2838.45,2415.78 r0 top value=1nF
C76 "Cap" 1608[0603] 2000,2965 r0 top value=NP
C165 "Cap" 0402-A 4278.51,2689.67 r180 top value=100nF
C166 "Cap" 0402-A 4278.51,2739.67 r180 top value=100nF
C167 "Cap" 0402-A 3670.1,2780.26 r90 top value=680pF
C168 "Cap" 0402-A 3480.1,2870.26 r90 top value=100nF
D1 "LED0" 1608[0603] 2295,2920 r180 top
D2 "LED0" 1608[0603] 1440,2930 r0 bottom
D3 "LED0" 1608[0603] 1040,2975 r180 top
D4 "D Schottky" DIO_RB050LAM_ROM 1648,1069.1 r90 top
D5 "LED0" 1608[0603] 2986.58,757.79 r0 top
D6 "LED0" 1608[0603] 3201.58,597.79 r90 top
D7 "LED0" 1608[0603] 3141.58,597.79 r90 top
D8 "D Schottky" 425 3216.58,1047.79 r180 top
D9 "D Schottky" 425 2665,545 r0 top
D10 "Diode" X3-WLB1608-2 2956.58,912.79 r180 top
D11 "D Schottky" DIO_RB050LAM_ROM 1783,1149.1 r90 top
D12 "D Schottky" DIO_RB050LAM_ROM 1653,834.1 r180 top
D13 "D Schottky" DIO_RB050LAM_ROM 1898,834.1 r0 top
D14 "LED0" 1608[0603] 1218.42,1221.7 r90 top
F1 "3557-2" CONN_3557-2_KEY 4160,980 r90 bottom
J1 "HSEC8-120-01-L-PV-4-1" "HSEC8-120-01-L-PV-4-1 Gold Fingers" 1450,3435 r0 top
L1 "Inductor" IHLP2525CZER6R8MA1 3605,1275 r270 top value=6.8uH
L2 "Inductor" IND_BOURNS_SRR1260 1625.48,2422.72 r90 bottom value=12uH
L3 "Inductor" IND_BOURNS_SRR1260 2065,2475 r90 top value=7.5uH
L4 "Inductor" IND_BOURNS_SRR1260 850,2510 r90 top value=12uH
P1 "Header 2" 2-1445096-2 2013.11,474.02 r0 bottom
P2 "Header 5" HDR1X5 978,604.1 r90 bottom
P3 "Header 2" 2-1445096-2 2685,1000 r90 bottom
P4 "Header 2" 2-1445096-2 3725.51,645 r180 bottom
P5 "Header 3" conn3_2-1445050-3_TEC 750,1487 r270 bottom
P6 "Header 5" HDR1X5 3725.44,2980.88 r0 bottom
Q1 "SIS412DN-T1-GE3" POWERPAK_1212-8 3045,1260 r180 top
Q2 "SIS412DN-T1-GE3" POWERPAK_1212-8 3285,1310 r90 top
Q3 "NMOS-2" SOT-23_M 1389.68,1164.3 r0 top
Q4 "NMOS-2" SOT-23_M 1958,1139.1 r0 top
R1 "Res1" 1608[0603] 2295,2980 r180 top value=470
R2 "Res1" 1608[0603] 1440,2985 r0 bottom value=470
R3 "Res1" 1608[0603] 1040,3035 r180 top value=470
R4 "Res1" 1608[0603] 1503.42,1331.7 r270 top value=11k
R5 "Res1" C1206 1583,1359.1 r270 top value=330
R6 "Res1" 1608[0603] 1360.31,1328.2 r90 top value=1k
R7 "Res1" C1206 2375.31,1068.2 r90 top value=0.05
R8 "Res1" 1608[0603] 1688,1359.1 r0 top value=20k
R9 "Res1" 1608[0603] 1303.42,751.7 r270 top value=220k
R10 "Res1" 1608[0603] 1393,654.1 r180 top value=11.3k
R11 "Res1" 1608[0603] 1528,1179.1 r90 top value=10k
R12 "Res1" 1608[0603] 1395.07,791.7 r180 top value=220k
R13 "Res1" 1608[0603] 2300.31,1333.2 r270 top value=510
R14 "Res1" 1608[0603] 2300.31,1223.2 r270 top value=510
R15 "Res1" 1608[0603] 1270,1110 r270 top value=1k
R16 "Res1" 1608[0603] 2770,455 r0 bottom value=10k
R17 "Res1" 0402-A 3050,590 r90 top value=9.1k
R18 "Res1" 0402-A 3146.58,1097.79 r180 top value=0
R19 "Res1" 0402-A 3406.58,972.79 r270 top value=2.2k
R20 "Res1" 0402-A 3361.58,972.79 r270 top value=100k
R21 "Res1" 0402-A 3051.58,687.79 r90 top value=100
R22 "Res1" 0402-A 2981.58,597.79 r0 top value=2.49k
R23 "Res1" 0402-A 2986.58,807.79 r180 top value=10k
R24 "Res1" 0402-A 3251.58,587.79 r270 top value=10k
R25 "Res1" 0402-A 3095,590 r270 top value=10k
R26 "Res1" 0402-A 3341.58,587.79 r90 top value=26.1k
R27 "Res1" 0402-A 3296.58,587.79 r90 top value=100k
R28 "Res1" 6-0805_M 2856.58,952.79 r270 top value=2
R29 "Res1" 0402-A 3031.58,957.79 r180 top value=10
R30 "Res1" 6-0805_M 3481.58,812.79 r270 top value=10m
R31 "Res1" 0402-A 3346.58,742.79 r0 top value=300k
R32 "Res1" 0402-A 3285,720 r90 top value=100k
R33 "Res1" 0402-A 995,2500 r90 bottom value=100k
R34 "Res1" 0402-A 1590,2890 r180 bottom value=10k
R35 "Res1" 0402-A 1225,2440 r90 bottom value=6.2k
R36 "Res1" 0402-A 1520,2855 r270 bottom value=45k
R37 "Res1" 0402-A 2630,2510 r90 top value=100k
R38 "Res1" 0402-A 2120,2895 r0 top value=10k
R39 "Res1" 0402-A 2400,2450 r90 top value=8.2k
R40 "Res1" 0402-A 2210,2855 r270 top value=73.2k
R41 "Res1" 0402-A 1475,2605 r90 top value=100k
R42 "Res1" 0402-A 885,2965 r0 top value=10k
R43 "Res1" 0402-A 1255,2550 r90 top value=4.3k
R44 "Res1" 0402-A 950,2935 r270 top value=20k
R45 "Res1" 0402-A 3650.1,2710.26 r0 top value=0
R46 "Res1" 0402-A 1449.66,1714 r270 top value=100
R47 "Res1" 0402-A 1104.66,1719 r0 top value=160
R48 "Res1" 0402-A 1104.66,1639 r0 top value=260
R49 "Res1" 1608[0603] 2645,455 r0 bottom value=10k
R50 "Res1" 0402-A 1104.66,1599 r0 top value=100
R51 "Res1" 0402-A 3773.51,2849.67 r180 top value=10k
R52 "Res1" 0402-A 3843.79,2780.88 r270 top value=470
R53 "Res1" 0402-A 3933.51,2779.67 r270 top value=100
R54 "Res1" 0402-A 3890.44,2780.88 r270 top value=100
R55 "Res1" 0402-A 3771.91,2808.49 r180 top value=16k
R56 "Res1" 0402-A 3733.51,2759.67 r0 top value=10k
R57 "Res1" 1608[0603] 2520,455 r0 bottom value=10k
RT1 "Res Thermal" 1608[0603] 2971.58,652.79 r180 top value=10k
U1 "PIC16F18325-I/JQ" UQFN16_JQ_MCH 1188.42,936.7 r180 top
U2 "BQ24617RGET" RGE24_2P45X2P45 3174.33,873.58 r0 top
U3 "TPS54622RHLR" RHL0014A 1119.96,2490.47 r270 bottom value=Value
U4 "TPS54622RHLR" RHL0014A 2510.63,2500.04 r270 top value=Value
U5 "TPS54622RHLR" RHL0014A 1360.04,2600.47 r270 top value=Value
U6 "BQ29200DRBT" DRB8_1P6X2P4 1301.59,1680.61 r0 top
U7 "PIC18F25K50-I/ML" QFN28_6X6MC_MCH 3866.32,2579.67 r0 top
U8 "TCAN334DR" D0008A_N 2837.94,2605 r90 top value=Value
U9 "D5V0L2B3W-7" SOT-323_DIO 2835.5,2895.43 r0 top
U10 "MCP2515-I/SO" SOIC-SO18_L 3246.91,2528.49 r90 top
U11 "MCP6021T-E/OT" SOT-23-OT5_N 1998,1359.1 r0 top
U24 "LSM6DSMTR" FP-LGA-14L-DM00249496-MFG 4133.51,2699.67 r90 top
U25 "TMP235AQDBZTQ1" FP-DBZ0003A-MFG 3572.7,2856.6 r90 top

## Footprints (in the part's own frame and the unit in brackets; to place one, negate y for a bottom-side part, rotate by r counter-clockwise, add the part's x,y. Pads: shape width x height; smd on the part's side, far side on the other; paste and mask are expansions set on the pad)
2-1445096-2 [mm]
  rect 1.3x2.6 smd: 1(0,0) 2(3,0)
  rect 3.45x1.7 smd: 3(-3.635,-3.2) 4(6.775,-3.2)
  body extent -5.1,-4.98 8.15,1.43, height 9.25
6-0805_M [mm] "Chip Resistor, Body 2.0x1.2mm, IPC Low Density"
  rect 1.4x1.5 smd: 1(-1,0) 2(1,0)
  silkscreen extent 0,-0.65 0,0.65, body extent -1.07,-0.7 1.07,0.7, height 0.7
0402-A [mm] "Chip Inductor, Body 1.0x0.5mm, IPC High Density"
  rect 0.6x0.5 smd: 1(-0.5,0) 2(0.5,0)
  silkscreen extent -1.1,-0.15 -1.1,0.15, body extent -0.55,-0.3 0.55,0.3, height 0.55
425 [mm] "SOD-123; 2 Leads; Body 2.7 x 1.6 mm, (LxW)"
  rect 1.6x0.85 smd: 1(-1.7,0) 2(1.7,0)
  silkscreen extent -0.5,-0.9 -0.5,0.9
1608[0603] [mm] "Chip Capacitor, Body 1.6x0.8mm, IPC High Density"
  rect 0.8x0.9 smd: 1(-0.7,0) 2(0.7,0)
  body extent -0.87,-0.48 0.87,0.48, height 1.3
C1206 [mm] "Chip Capacitor, Body 3.2x1.6mm, IPC High Density"
  rect 1.1x1.7 smd: 1(-1.35,0) 2(1.35,0)
  silkscreen extent -0.4,-0.75 0.4,0.75, body extent -1.7,-0.9 1.7,0.9, height 1.3
C1210 [mm] "Chip Capacitor, Body 3.2x2.5mm, IPC High Density"
  rect 1.1x2.6 smd: 1(-1.35,0) 2(1.35,0)
  silkscreen extent -0.4,-1.2 0.4,1.2, body extent -1.7,-1.35 1.7,1.35, height 1.3
conn3_2-1445050-3_TEC [mil]
  round 60 hole 40 mask+0: 1(0,0) 2(-118,0) 3(-236,0)
  round 50 hole 50: 4(121,-77) 5(-357,-77)
  silkscreen extent -441,-161 255,72, body extent -372,-151 132,72, height 394
CONN_3557-2_KEY [mil]
  round 88 hole 68 mask+0: 1(0,0) 2(0,-130) 3(530,0) 4(530,-130)
  silkscreen extent -172,-205 662,75, body extent -135,-205 665,75, height 290
D0008A_N [mm]
  oval 1.45x0.6 smd paste+0 mask+0.051: 1(-2.725,1.905) 2(-2.725,0.635) 3(-2.725,-0.635) 4(-2.725,-1.905) 5(2.725,-1.905) 6(2.725,-0.635) 7(2.725,0.635) 8(2.725,1.905)
  silkscreen extent -3.3,-2.5 0.9,2.5, body extent 0,0 0.25,0.25, height 0.25
DIO_RB050LAM_ROM [mil]
  rect 28x59 smd paste+0 mask+0: 1(-89.5,0) 2(89.5,0)
  silkscreen extent -78,-54 78,54, body extent 0,0 10,10, height 10
DRB8_1P6X2P4 [mm]
  rect 0.85x0.35 smd: 1(-1.475,0.975) 2(-1.475,0.325) 3(-1.475,-0.325) 4(-1.475,-0.975) 5(1.475,-0.975) 6(1.475,-0.325) 7(1.475,0.325) 8(1.475,0.975)
  rect 1.6x2.4 smd: 9(0,0)
  silkscreen extent -1.7,-1.7 1.7,1.7
FP-DBZ0003A-MFG [mm]
  rrect17% 1.3x0.6 smd paste+0 mask+0: 1(-1.05,0.95) 2(-1.05,-0.95) 3(1.05,0)
  silkscreen extent -0.7,-1.52 0.7,1.52, body extent -1.8,-1.62 1.8,1.62, height 0.25
FP-LGA-14L-DM00249496-MFG [mm]
  rect 0.575x0.35 smd paste+0 mask+0: 1(-1.162,0.75) 2(-1.162,0.25) 3(-1.162,-0.25) 4(-1.162,-0.75) 8(1.162,-0.75) 9(1.162,-0.25) 10(1.162,0.25) 11(1.162,0.75)
  rect 0.35x0.575 smd paste+0 mask+0: 5(-0.5,-0.913) 6(0,-0.913) 7(0.5,-0.913) 12(0.5,0.913) 13(0,0.913) 14(-0.5,0.913)
  silkscreen extent -2.5,-1.58 1.83,1.58, body extent -2.05,-1.8 2.05,1.8, height 0.25
HDR1X5 [mm] "Connector; Header; 5 Position"
  rect 1.5x1.5 hole 0.9: 1(0,0)
  round 1.5 hole 0.9: 2(2.54,0) 3(5.08,0) 4(7.62,0) 5(10.16,0)
  silkscreen extent -1.27,-1.27 11.43,1.27
"HSEC8-120-01-L-PV-4-1 Gold Fingers" [mil]
  rect 303x400 smd paste-400: 0(-629,-17.25) 1(-156,-17.25)
  rect 19.68x400 smd paste-400: 2(154.5,-17.25) 3(186,-17.25) 4(217.5,-17.25) 5(249,-17.25) 6(280.5,-17.25) 7(312,-17.25) 8(343.5,-17.25) 9(375,-17.25) 10(406.5,-17.25) 11(438,-17.25) 12(469.5,-17.25) 13(501,-17.25) 14(532.5,-17.25) 15(564,-17.25) 16(595.5,-17.25) 17(627,-17.25) 18(658.5,-17.25) 19(690,-17.25) 20(721.5,-17.25) 21(753,-17.25)
  rect 303x400 smd far side paste-400: 22(-629,-17.25) 23(-156,-17.25)
  rect 19.68x400 smd far side paste-400: 24(154.5,-17.25) 25(186,-17.25) 26(217.5,-17.25) 27(249,-17.25) 28(280.5,-17.25) 29(312,-17.25) 30(343.5,-17.25) 31(375,-17.25) 32(406.5,-17.25) 33(438,-17.25) 34(469.5,-17.25) 35(501,-17.25) 36(532.5,-17.25) 37(564,-17.25) 38(595.5,-17.25) 39(627,-17.25) 40(658.5,-17.25) 41(690,-17.25) 42(721.5,-17.25) 43(753,-17.25)
  Keep-Out Layer region: -825,-220 792.61,-220 792.61,225 -825,225
  Keep-Out Layer region: -825,-285 60,-285 60,-230 -825,-230
IHLP2525CZER6R8MA1 [mil]
  rect 95x135 smd: 1(0,0) 2(230,0)
IND_BOURNS_SRR1260 [mil]
  rect 114x213 smd paste+0 mask+0: 1(-191,0) 2(191,0)
  silkscreen extent -257,-257 257,257, body extent -260,-260 260,260, height 236
POWERPAK_1212-8 [mil]
  rect 39x16 smd paste-19: 1(-58.75,38.39) 2(-58.75,12.8) 3(-58.75,-12.8) 4(-58.75,-38.39) 5(58.75,-38.39) 6(58.75,-12.8) 7(58.75,12.8) 8(58.75,38.39)
  Top Layer region: 59,-44 59,44 -9,44 -9,-44
  silkscreen extent -67,-72 67,72, body extent 0,0 10,10, height 10
QFN28_6X6MC_MCH [mil]
  rect 40x12 smd: 1(-110,76.77) 2(-110,51.18) 3(-110,25.59) 4(-110,0) 5(-110,-25.59) 6(-110,-51.18) 7(-110,-76.77) 15(110,-76.77) 16(110,-51.18) 17(110,-25.59) 18(110,0) 19(110,25.59) 20(110,51.18) 21(110,76.77)
  rect 12x40 smd: 8(-76.77,-110) 9(-51.18,-110) 10(-25.59,-110) 11(0,-110) 12(25.59,-110) 13(51.18,-110) 14(76.77,-110) 22(76.77,110) 23(51.18,110) 24(25.59,110) 25(0,110) 26(-25.59,110) 27(-51.18,110) 28(-76.77,110)
  rect 165x165 smd: 29(0,0)
  silkscreen extent -123,-123 123,123
RGE24_2P45X2P45 [mm]
  rect 0.85x0.28 smd: 1(-1.975,1.25) 2(-1.975,0.75) 3(-1.975,0.25) 4(-1.975,-0.25) 5(-1.975,-0.75) 6(-1.975,-1.25) 13(1.975,-1.25) 14(1.975,-0.75) 15(1.975,-0.25) 16(1.975,0.25) 17(1.975,0.75) 18(1.975,1.25)
  rect 0.28x0.85 smd: 7(-1.25,-1.975) 8(-0.75,-1.975) 9(-0.25,-1.975) 10(0.25,-1.975) 11(0.75,-1.975) 12(1.25,-1.975) 19(1.25,1.975) 20(0.75,1.975) 21(0.25,1.975) 22(-0.25,1.975) 23(-0.75,1.975) 24(-1.25,1.975)
  rect 2.45x2.45 smd: 25(0,0)
  silkscreen extent -2.46,-2.46 2.46,2.46
RHL0014A [mm]
  oval 0.24x0.6 smd: 1(-0.75,1.65) 7(-0.75,-1.65) 8(0.75,-1.65) 14(0.75,1.65)
  oval 0.6x0.24 smd: 2(-1.65,1) 3(-1.65,0.5) 4(-1.65,0) 5(-1.65,-0.5) 6(-1.65,-1) 9(1.65,-1) 10(1.65,-0.5) 11(1.65,0) 12(1.65,0.5) 13(1.65,1)
  rect 2.05x2.05 smd: 15(0,0)
  round 0.5 hole 0.203 mask-25.4: 16(0.775,0) 17(0,0.775) 18(-0.775,0) 19(0,-0.775)
  silkscreen extent -1.98,-1.97 1.97,1.97
SOIC-SO18_L [mm] "SOIC, 18-Leads, Body 11.6x7.5mm, Pitch 1.27mm, IPC High Density"
  oval 2x0.6 smd: 1(-4.5,5.08) 2(-4.5,3.81) 3(-4.5,2.54) 4(-4.5,1.27) 5(-4.5,0) 6(-4.5,-1.27) 7(-4.5,-2.54) 8(-4.5,-3.81) 9(-4.5,-5.08) 10(4.5,-5.08) 11(4.5,-3.81) 12(4.5,-2.54) 13(4.5,-1.27) 14(4.5,0) 15(4.5,1.27) 16(4.5,2.54) 17(4.5,3.81) 18(4.5,5.08)
  silkscreen extent -4.62,-5.9 3.1,6.05, body extent -3.8,-5.87 3.8,5.87, height 2.65
SOT-23-OT5_N [mm] "SOT23, 5-Leads, Body 2.9x1.7mm, Pitch 0.95mm, Lead Span 2.8mm, IPC Medium Density"
  rect 1.1x0.65 smd: 1(-1.2,0.95) 2(-1.2,0) 3(-1.2,-0.95) 4(1.2,-0.95) 5(1.2,0.95)
  silkscreen extent -1.32,-1.55 0.25,1.95, body extent -0.9,-1.55 0.9,1.55, height 1.45
SOT-23_M [mm] "SOT23, 3-Leads, Body 2.9x1.3mm, Pitch 0.95mm, Lead Span 2.5mm, IPC Low Density"
  rect 1.45x0.6 smd: 1(-1.175,0.95) 2(-1.175,-0.95) 3(1.175,0)
  silkscreen extent -1.3,-1.5 0.7,1.92, body extent -0.7,-1.5 0.7,1.5, height 1.1
SOT-323_DIO [mm]
  rect 0.451x1.111 smd paste+0 mask+0: 1(-0.7,-0.9) 2(0.7,-0.9) 3(0,0.9)
  silkscreen extent -2.5,-1.23 1.23,0.8, body extent 0,0 0.25,0.25, height 0.25
UQFN16_JQ_MCH [mil]
  rect 32x12 smd paste+0 mask+0: 1(-74.5,38.39) 2(-74.5,12.8) 3(-74.5,-12.8) 4(-74.5,-38.39) 9(74.5,-38.39) 10(74.5,-12.8) 11(74.5,12.8) 12(74.5,38.39)
  rect 12x32 smd paste+0 mask+0: 5(-38.39,-74.5) 6(-12.8,-74.5) 7(12.8,-74.5) 8(38.39,-74.5) 13(38.39,74.5) 14(12.8,74.5) 15(-12.8,74.5) 16(-38.39,74.5)
  rect 106x106 smd paste-52.5 mask+0: 17(0,0)
  silkscreen extent -84,-84 110,84, body extent 0,0 10,10, height 10
X3-WLB1608-2 [mm]
  rect 1.035x0.69 smd: 1(0.293,0)
  rect 0.385x0.69 smd: 2(-0.619,0)
  body extent -0.81,-0.42 0.81,0.42, height 0.3

## Part data
C1 C2 C3 C4 C5 C6 C7 C8 C9 C10 C11 C12 C13 C14 C15 C16 C17 C23 C24 C25 C26 C27 C28 C29 C30 C31 C32 C33 C34 C35 C36 C37 C38 C39 C40 C41 C42 C43 C44 C45 C46 C47 C48 C49 C50 C51 C52 C53 C54 C55 C56 C57 C58 C59 C60 C61 C62 C63 C64 C65 C66 C67 C70 C71 C72 C76 C165 C166 C167 C168: "Capacitor", LatestRevisionDate=17-Jul-2002, LatestRevisionNote="Re-released for DXP Platform.", PackageDescription="Radial Cap, Thru-Hole; 2 Leads; 0.3 in Pin Spacing", PackageReference=RAD-0.3, Published=8-Jun-2000, Publisher="Altium Limited"
D4 D8 D9 D11 D12 D13: "Schottky Diode", Code_JEDEC=DO-214-AA, LatestRevisionDate=17-Jul-2002, LatestRevisionNote="Re-released for DXP Platform.", PackageDescription="DO-214-AA/SMB; 2 C-Bend Leads; Body 5.3 x 3.6 mm, inc. leads (LxW)", PackageReference=SMB, Published=8-Jun-2000, Publisher="Altium Limited"
D10: "Default Diode", Code_JEDEC=DO-214-AB, LatestRevisionDate=17-Jul-2002, LatestRevisionNote="Re-released for DXP Platform.", PackageDescription="DO-214-AB/SMC; 2 C-Bend Leads; Body 7.9 x 5.9 mm, inc. leads (LxW)", PackageReference=SMC, PackageVersion=Sep-1996, Published=8-Jun-2000, Publisher="Altium Limited"
D14: "Typical INFRARED GaAs LED", LatestRevisionDate=08-Jul-2005, LatestRevisionNote="Mech Layer 1 removed.", PackageDescription="LED; 2 Leads", PackageReference=LED-0, Published=8-Jun-2000, Publisher="Altium Limited"
F1 Q1 Q2 U1 U9: "No Description Available", Copyright="Copyright (C) 2018 Accelerated Designs. All rights reserved", RefDes=RefDes, Type=DEV
  F1: Built_By=EMA_Cory, Manufacturer_Part_Number=3557-2, SourceLibrary="Keystone Electronics_Complete_2020-01-22", Vendor="Keystone Electronics"
  Q1 Q2: Built_By=EMA_Cory, Datasheet=https://www.vishay.com/docs/69006/sis412dn.pdf, Manufacturer_Part_Number=SIS412DN-T1-GE3, Vendor=Vishay
  U1: Built_By=EMA_Cory, Datasheet=https://ww1.microchip.com/downloads/en/DeviceDoc/PIC16-L-F18325-18345-Data-Sheet-40001795H.pdf, Manufacturer_Part_Number=PIC16F18325-I/JQ, SourceLibrary=Add_to_database_2020-10-27, Vendor=Microchip
  U9: Built_By=EMA_UL_Team, Manufacturer_Part_Number=D5V0L2B3W-7, SourceLibrary=DIODESINC_2_2015-08-18, Vendor="Diodes Inc"
P1 P3 P4: "Header, 2-Pin", LatestRevisionDate=17-Jul-2002, LatestRevisionNote="Re-released for DXP Platform.", Publisher="Altium Limited"
P2 P6: "Header, 5-Pin", LatestRevisionDate=17-Jul-2002, LatestRevisionNote="Re-released for DXP Platform.", Publisher="Altium Limited"
P5: "Header, 3-Pin", LatestRevisionDate=17-Jul-2002, LatestRevisionNote="Re-released for DXP Platform.", Publisher="Altium Limited"
Q3 Q4: "N-Channel Power MOSFET", ComponentLink1Description="Manufacturer Link", ComponentLink1URL=http://www.irf.com/, DatasheetVersion=PD-9.814, LatestRevisionDate=17-Jul-2002, LatestRevisionNote="Re-released for DXP Platform.", Note="Pin 2 is electrically connected to pin 4.", PackageDescription="TO, Thru-Hole, Vertical, Heatsink Mounted; 3 In-Line Leads; Pitch 2.54 mm", PackageReference=TO-220AB, PackageVersion=Feb-1997, Published=8-Jun-2000, Publisher="Altium Limited"
R1 R2 R3 R4 R5 R6 R7 R8 R9 R10 R11 R12 R13 R14 R15 R16 R17 R18 R19 R20 R21 R22 R23 R24 R25 R26 R27 R28 R29 R30 R31 R32 R33 R34 R35 R37 R38 R39 R41 R42 R43 R44 R45 R46 R47 R48 R49 R50 R51 R52 R53 R54 R55 R56 R57: "Resistor", LatestRevisionDate=17-Jul-2002, LatestRevisionNote="Re-released for DXP Platform.", PackageDescription="Axial Device, Thru-Hole; 2 Leads; 0.3 in Pin Spacing", PackageReference=AXIAL-0.3, Published=8-Jun-2000, Publisher="Altium Limited"
R36 R40: "Resistor 1%", LatestRevisionDate=17-Jul-2002, LatestRevisionNote="Re-released for DXP Platform.", PackageDescription="Axial Device, Thru-Hole; 2 Leads; 0.3 in Pin Spacing", PackageReference=AXIAL-0.3, Published=8-Jun-2000, Publisher="Altium Limited"
RT1: "Thermistor", Code_IPC=RESC2012, LatestRevisionDate=29-May-2009, LatestRevisionNote="IPC-7351 Footprint Added.", PackageDescription="Chip Resistor 0805 Case Size", PackageReference=6-0805, PackageVersion=Mar-2003, Published=24-Mar-1999, Publisher="Altium Limited"
U2 U3 U4 U5 U6: Manufacturer="Texas Instruments"
  U2: Built_By=EMA_UL_Team, C="Copyright (C) 2015 Accelerated Designs. All rights reserved", Manufacturer_Part_Number=BQ24617RGET, Vendor=Vendor
  U3 U4 U5: CompType=IC, MountType=SMT, PackageReference=RHL0014A, PartNumber=TPS54622RHLR, PIN_COUNT=15, RoHS=Y
  U6: Built_By=EMA_UL_Team, C="Copyright (C) 2015 Accelerated Designs. All rights reserved", Manufacturer_Part_Number=BQ29200DRBT, Vendor=Vendor
U8: "No Description Available", Manufacturer="Texas Instruments", Copyright="Copyright (C) 2018 Accelerated Designs. All rights reserved", PartNumber=TCAN334DR, RefDes=RefDes, Type=DEV
U10: library part CMP-0186-00133-2, "Stand-Alone CAN Controller With SPI Interface, 18-Pin SOIC, Industrial Temperature", Code_JEDEC=MS-013, ComponentLink1Description="Manufacturer URL", ComponentLink1URL=http://www.microchip.com/, ComponentLink2Description=Datasheet, ComponentLink2URL=http://ww1.microchip.com/downloads/en/DeviceDoc/21801f.pdf, ComponentLink3Description="Package Specification", ComponentLink3URL=http://www.microchip.com/stellent/groups/techpub_sg/documents/packagingspec/en012702.pdf, DatasheetVersion="revF, Oct-2010", PackageDescription="18-Lead Plastic Small Outline (SO) - Wide 7.50mm Body [SOIC]", PackageReference=SOIC-SO18, PackageVersion="revBB, Aug-2009", RevisionNote="URLs added. DatasheetVersion updated."
U11: library part CMP-0187-00449-2, "Rail-to-Rail Input/Output, 10 MHz Operational Amplifier, 5-Pin SOT-23, Extended Temperature, Tape and Reel", Code_IPC=SOT23-5, ComponentLink1Description="Manufacturer URL", ComponentLink1URL=http://www.microchip.com/, ComponentLink2Description=Datasheet, ComponentLink2URL=http://ww1.microchip.com/downloads/en/DeviceDoc/21685d.pdf, ComponentLink3Description="Package Specification", ComponentLink3URL=http://www.microchip.com/stellent/groups/techpub_sg/documents/packagingspec/en012702.pdf, DatasheetVersion="revD, Feb-2009", PackageDescription="5-Lead Plastic Small Outline Transistor (OT) [SOT-23]", PackageReference=SOT-23-OT5, PackageVersion="revBB, Aug-2009", RevisionNote="URLs added."
U24: library part CMP-12177-000008-1, "IMU ACCEL/GYRO I2C/SPI 14LGA", Manufacturer=STMicroelectronics, Max Supply Voltage=3.6V, Min Supply Voltage=1.62V, Operating Supply Current=0.29-0.65mA, Package=LGA-14L-DM00249496, Temperature="-40°C to +85°C", Temperature Range High=+85°C, Temperature Range Low=-40°C, Accel Range=2/4/8/16g, Automotive=No, Category=IC, ComponentLink2Description=Datasheet, ComponentLink2URL=https://www.st.com/resource/en/datasheet/lsm6dsm.pdf, Device Class L1=Sensors, Device Class L2="Motion Sensors", Device Class L3="Inertial Measurement Units (IMUs)", Digikey Description="IMU ACCEL/GYRO I2C/SPI 14LGA", Footprint Url=https://www.st.com/content/ccc/resource/technical/document/technical_note/73/17/9c/16/dd/96/4a/01/CD00134799.pdf/files/CD00134799.pdf/jcr:content/translations/en.CD00134799.pdf, Gyro Range=125/250/500/1000/2000°/s, Height=0.86mm, Lead Free=Yes, Manufacturer Part Number=LSM6DSMTR, Mouser Description="LSM6DSM Series 3.6 V I2C/SPI 3D Accelerometer and 3D Gyroscope - LGA-14", Octopart=https://octopart.com/lsm6dsmtr-stmicroelectronics-66358194, Resolution=16bits, RoHS=TRUE, Sensor Output=I2C,SPI, Sensor Type=Temperature,Accelerometer,Gyroscope
U25: library part CMP-04948-000003-1, "LOW-POWER HIGH-ACCURACY ANALOG O", Ambient Temperature Range High=+150°C, Ambient Temperature Range Low=-40°C, Manufacturer="Texas Instruments", Manufacturer Part Number=TMP235A2DBZR, Max Supply Voltage=5.5V, Min Supply Voltage=2.3V, Operating Supply Current=9uA, Output Current=500uA, Package=DBZ0003A, Temperature="-40°C to +150°C", Accuracy=0.5%, Automotive=No, Category=IC, ComponentLink2Description=Datasheet, ComponentLink2URL=http://www.ti.com/lit/ds/symlink/tmp235.pdf, Device Class L1=Sensors, Device Class L2="Temperature and Humidity Sensors", Device Class L3=unset, Digikey Description="LOW-POWER HIGH-ACCURACY ANALOG O", Height=1.12mm, Lead Free=Yes, Max Junction Temp=+150°C, Mouser Description="±2°C Analog output temperature sensor, with 10mV /°C gain 3-SOT-23 -40 to 150", Octopart=https://octopart.com/tmp235a2dbzr-texas+instruments-94966376, RoHS=TRUE, Sensor Output="Analog Voltage", Standoff Height=0.01mm, Temperature Range High=+150°C, Temperature Range Low=-40°C
D1 D2 D3 D5 D6 D7: LatestRevisionDate=08-Jul-2005, LatestRevisionNote="Mech Layer 1 removed.", PackageDescription="LED; 2 Leads", PackageReference=LED-0, Published=8-Jun-2000, Publisher="Altium Limited"
J1: Supplier 1=Mouser
L1 L2 L3 L4: Code_IEC=1005, Code_JEITA=0402, LatestRevisionDate=29-May-2009, LatestRevisionNote="IPC-7351 Footprint Added.", PackageDescription="Chip Inductor", PackageReference=0402-A, Published=8-Jun-2000, Publisher="Altium Limited"
U7: Built_By=EMA_UL_Team, C="Copyright (C) 2015 Accelerated Designs. All rights reserved", Manufacturer_Part_Number=PIC18F25K50-I/ML, SourceLibrary=Microchip_2014-11-20, Vendor=Microchip

## Free pads (board coordinates)
  round 130 hole 130 unplated: 5(175.5,2964.5) 6(175.5,564.5) 7(4575.5,564.5) 8(4575.5,2964.5)

## Via types
v1: diameter 18, hole 8, Top Layer to Bottom Layer, tented both sides, 159 vias

## Nets (pads, with @x,y where several pads share a name; then routed paths per layer and width w, separated by ;. In a path a pad name is that pad's centre, name@x,y a point inside that pad or via, vN(x,y) a via of type N, cw(c..) or ccw(c..) an arc to the next point about the centre after c; other vN are vias at no path point)
1V8: C2.2 C52.2 C54.2 J1.0 L4.2 R3.2 R42.1 | length 1089.6
  Top Layer w10: R42.1@862.87,2965 R42.1@865.32,2965 865.32,2968.5 870.78,2968.5 872.13,2969.84 872.13,2975.31 931.82,3035 R3.2@1012.44,3035
  Top Layer w20: C2.2@782.56,3045 782.85,3044.7 782.85,2950.3 C52.2@783.15,2950 ; J1.0@782.56,3379.31 J1.0@821,3417.75 ; C54.2@843.62,2918.82 C54.2@847.44,2915 847.44,2949.57 R42.1@862.87,2965 ; L4.2@847.44,2703.56 L4.2@850,2701
  Top Layer w40: C2.2@782.56,3045 820,3082.44 820,3416.75 J1.0@821,3417.75 ; C52.2@783.15,2950 783.15,2920.47 784.8,2918.82 C54.2@843.62,2918.82 ; L4.2@847.44,2703.56 C54.2@847.44,2915
3V3: C1.2 C38.2 C40.2 C65.2 C66.2 C70.2 C71.1 C72.2 C165.2 C166.2 C168.1 J1.23 L2.2 P6.2 R2.2 R34.1 R51.2 U7.17 U8.3 U10.9 U24.5 U24.8 U25.1 | length 1478.1
  Top Layer w5: C72.2@2862.94,2418.85 C72.2@2866.01,2415.78 ; C71.1@2866.01,2353.82 C71.1@2866.01,2355.78 ; v1(3415,2885) 3416.61,2885 3451.04,2850.58 C168.1@3480.1,2850.58 3480.1,2831.26 3496.11,2815.26 U25.1@3535.3,2815.26 ; v1(3700,2885) 3735.33,2849.67 R51.2@3753.82,2849.67 ; P6.2@3825,2980 3860.31,2944.69 C66.2@3860.31,2890 ; C70.2@4032.62,2554.08 C70.2@4033.79,2555.25 ; C65.2@4072.61,2555.25 C65.2@4073.5,2554.35 ; U24.8@4163.03,2745.44 4163.18,2745.29 4210,2745.29 ; U24.5@4169.43,2679.98 4247.17,2679.98 4256.85,2689.67 C165.2@4258.82,2689.67 C166.2@4258.82,2739.67 4253.2,2745.29 4210,2745.29 ; v1(4210,2805) 4210,2745.29
  Top Layer w10: C72.2@2862.94,2418.85 U8.3@2862.94,2497.72 ; C72.2@2866.01,2415.78 C71.1@2866.01,2355.78 2914.22,2355.78 v1(2945,2325) ; U10.9@3446.91,2323.76 3446.91,2270.26 3455,2262.16 v1(3455,2260) ; U7.17@3976.32,2554.08 C70.2@4032.62,2554.08 ; C70.2@4033.79,2555.25 C65.2@4072.61,2555.25 ; v1(4065,2595) 4075,2585 4075,2555.85 C65.2@4073.5,2554.35
  Top Layer w20: U10.9@3446.91,2323.76 U10.9@3446.91,2351.32
  Bottom Layer w10: R34.1@1602.87,2894.84 1607.72,2890 R34.1@1609.68,2890
  Bottom Layer w20: R34.1@1607.72,2890 1622.45,2875.26 1622.45,2842.75 C40.2@1628.2,2837.01 ; R34.1@1609.68,2890 R34.1@1611.34,2890 ; L2.2@1625.48,2613.72 L2.2@1628.2,2616.44
  Bottom Layer w300: 1294,3125.41 J1.23@1294,3417.75
5V0: C15.2 C17.2 C45.2 C47.2 C76.2 J1.1 L3.2 P2.2 R1.2 R9.2 R38.1 U1.16 U11.2 | length 1540.3
  Top Layer w5: C17.2@1226.8,782.52 C17.2@1230.07,779.26 C17.2@1243.31,766.01 ; R9.2@1300,722.69 1301.45,724.14 R9.2@1303.42,724.14
  Top Layer w10: P2.2@978,704.1 1053.16,779.26 C17.2@1230.07,779.26 ; C17.2@1226.8,782.52 U1.16@1226.8,862.2 ; v1(1868,1309.1) 1868,1334.57 1890.56,1357.13 C15.2@1890.56,1359.1 U11.2@1950.76,1359.1 ; R38.1@2100.32,2895 R38.1@2101.97,2895 ; 2107.13,2905.31 2169.1,2967.28 2256.69,2967.28 2267.44,2978.03 R1.2@2267.44,2980
  Top Layer w20: C17.2@1230.07,779.26 1232.03,779.26 1237.78,773.51 1237.78,771.6 1249.5,759.89 1258.59,759.89 1288.59,729.89 1297.67,729.89 R9.2@1303.42,724.14 ; J1.1@1290,3413.75 J1.1@1294,3417.75 ; C45.2@2023.15,2870 2025.35,2872.2 2025.35,2962.8 C76.2@2027.56,2965 ; L3.2@2077.44,2657.56 L3.2@2080,2655 ; R38.1@2101.97,2895 2102.44,2894.53 C47.2@2102.44,2835
  Top Layer w40: C45.2@2023.15,2870 2023.15,2846.65 C45.2@2024.8,2845 ; L3.2@2077.44,2657.56 L3.2@2102.44,2682.56
  Top Layer w300: J1.1@1294,3417.75 1295,3416.75 1295,3125
  Bottom Layer w40: v1(1868,1309.1) 1935,1376.1 v1(1935,1500)
ACSET: C30.1 R17.2 R20.2 R23.1 R24.1 R25.1 R27.2 U2.4 U2.10 U2.16 | length 1271.7
  Top Layer w5: R23.1@3006.26,807.79 R23.1@3008.23,807.79 ; U2.4@3095.63,862.79 U2.4@3096.58,863.74 ; U2.10@3184.18,795.82 3184.18,765.82 3185,765
  Top Layer w10: R23.1@3008.23,807.79 3035.73,835.29 ; v1(3015,860) 3035.73,839.27 3035.73,835.29 ; U2.4@3096.58,863.74 3064.18,863.74 3035.73,835.29 ; 3185,765 3185,752.16 3195,742.16 v1(3195,740) ; U2.16@3252.09,883.42 3284.45,883.42 v1(3296.58,895.55) C30.1@3296.58,953.11
  Top Layer w20: R17.2@3050.16,610 3094.84,610 R25.1@3095,609.84 ; R25.1@3095,609.68 R25.1@3095,609.84 ; v1(3095,655) R25.1@3095,609.84 ; R24.1@3251.58,607.48 3274.08,607.48 ; v1(3260,645) 3274.08,630.92 3274.08,607.48 ; R27.2@3296.58,607.48 3274.08,607.48 ; C30.1@3296.73,953.11 R20.2@3361.58,953.11
  Bottom Layer w10: v1(3015,860) 3015,855 3142.5,727.5 3182.5,727.5
  Bottom Layer w20: v1(3095,655) 3105,645 3182.5,645 ; v1(3260,645) 3182.5,645 ; v1(3296.58,895.55) 3296.58,806.58 3230,740 v1(3195,740) 3182.5,727.5 3182.5,645
BTST: D8.2 R18.1 U2.22 | length 177
  Top Layer w10: 3131.58,1000.94 3163.98,968.54 3163.98,951.85 U2.22@3164.49,951.33
  Top Layer w20: 3131.58,1000.94 3131.58,1041.06 3138.31,1047.79 D8.2@3149.65,1047.79 ; D8.2@3159.53,1047.79 3166.26,1054.52 R18.1@3166.26,1097.79
BTSTOUT: C23.2 L1.1 Q1.1 Q1.2 Q1.3 Q2.5 Q2.6 Q2.7 Q2.8 U2.20 | length 956.9
  Top Layer w5: U2.20@3203.87,951.33 3204.38,951.85 U2.20@3204.38,955.28
  Top Layer w10: 3196.58,1142.79 3201.58,1147.79 ; 3201.58,1010.32 3204.38,1007.52 U2.20@3204.38,955.28 ; 3201.58,1032.79 3203.87,1030.5
  Top Layer w20: Q1.3@3103.75,1272.8 3103.75,1270.39 Q1.2@3103.75,1247.2 Q1.1@3103.75,1221.61 3105.36,1220 3201.58,1220 ; C23.2@3166.26,1142.79 3196.58,1142.79 ; 3201.58,1010.32 3201.58,1032.79 3201.58,1147.79 3201.58,1220 ; L1.1@3605,1275 3570,1310 3221,1310 3216.99,1305.99 3216.99,1235.41 3201.58,1220
FSKI: C14.2 R9.1 R10.2 R12.2 U1.1 | length 348
  Top Layer w5: U1.1@1262.92,898.31 1272.92,898.31 1305.07,866.16 R9.1@1305.07,784.26 ; R9.1@1303.42,779.26 1303.42,784.26 1310.86,791.7 R12.2@1367.51,791.7 C14.2@1367.51,721.7 ; R10.2@1365.44,654.1 1366.29,654.94 C14.2@1366.29,720.48
  Top Layer w20: C14.2@1366.29,720.48 C14.2@1367.51,721.7